# Altium PCB test_board.PcbDoc (part 1 of 2)
Units mm, origin at the board's own origin, x right, y up, seen from the top; angles counter-clockwise.
Board outline 152.4 x 101.6 mm, 18 copper layers (F.Cu, F.Mask, B.Cu, B.Mask, F.SilkS, B.SilkS, F.Adhes, B.Adhes, F.Paste, B.Paste, Dwgs.User, Cmts.User, Eco1.User, Eco2.User, Edge.Cuts, Margin, B.CrtYd, F.CrtYd); 95 components, 140 nets, 510 pads, 121 vias.
Unrouted connection lines stored in the file: 95.
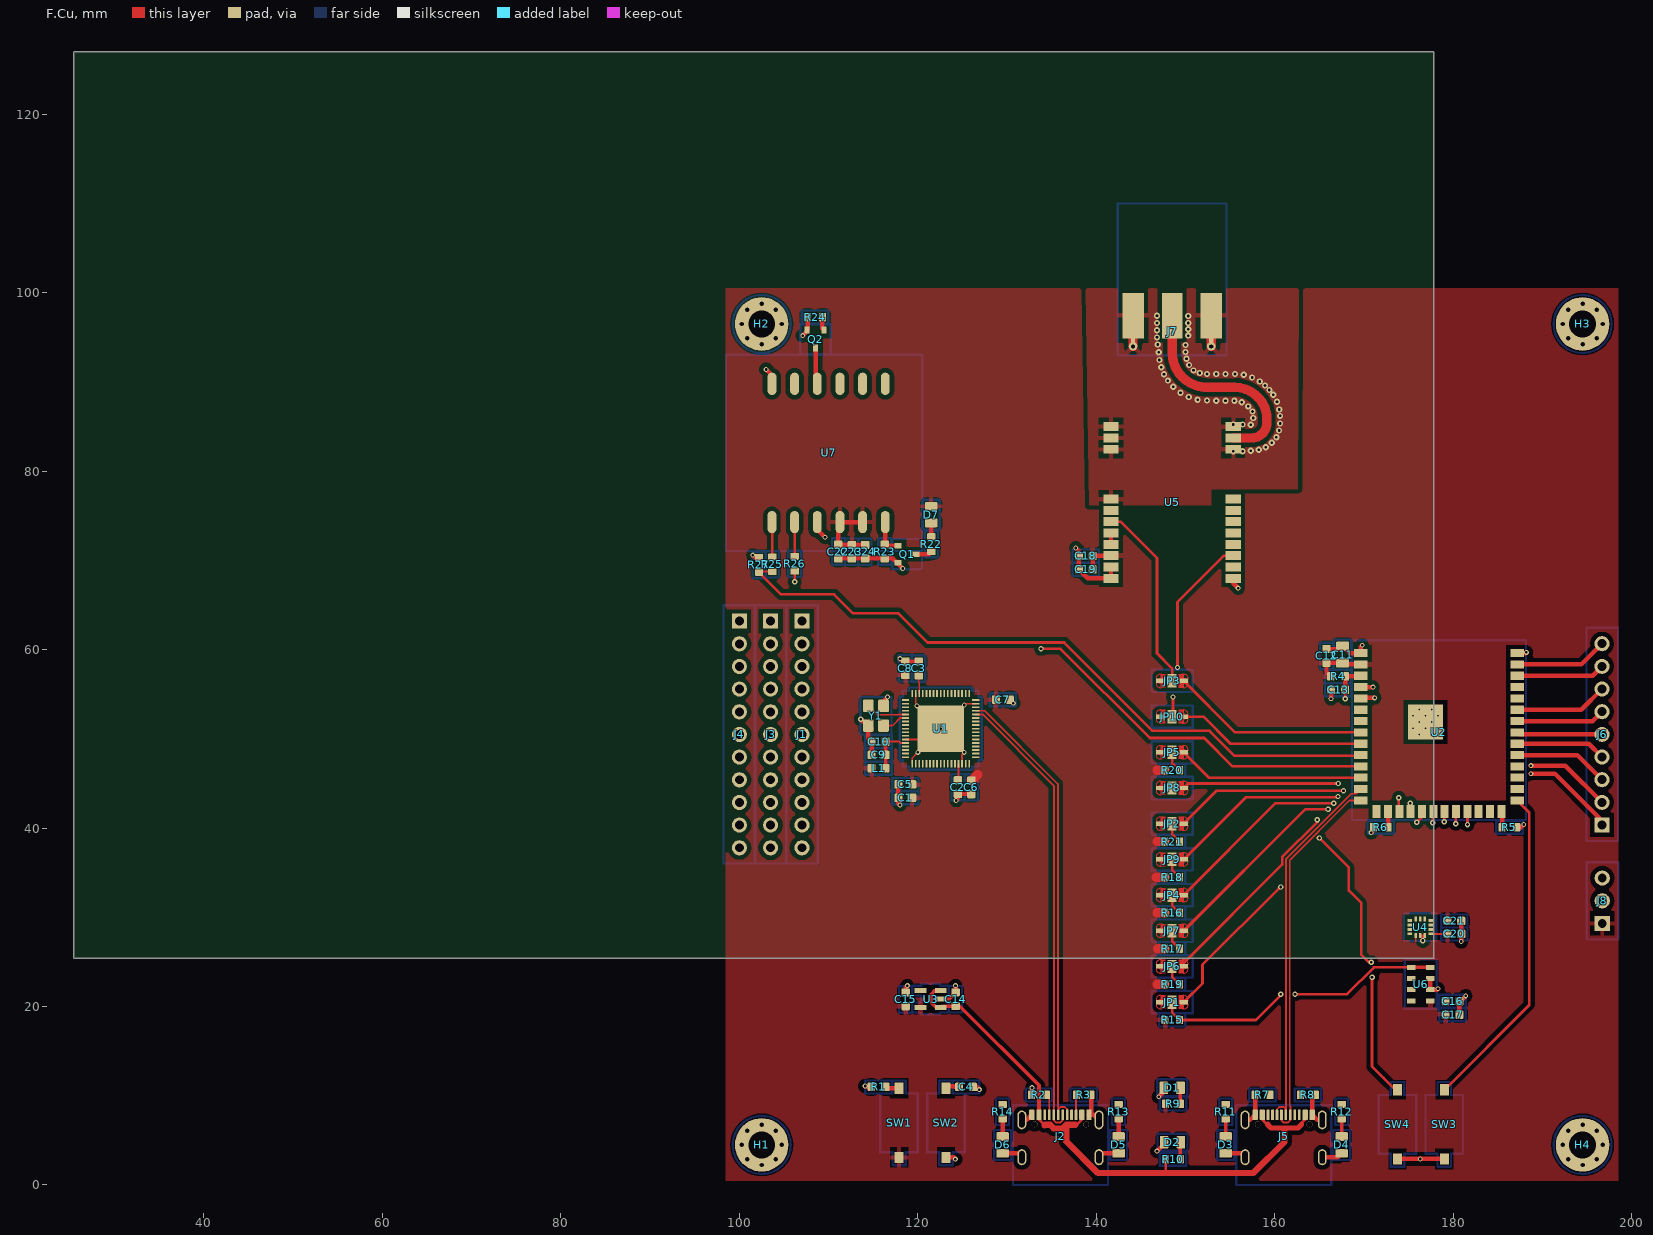
[diagram p0: F.Cu view]
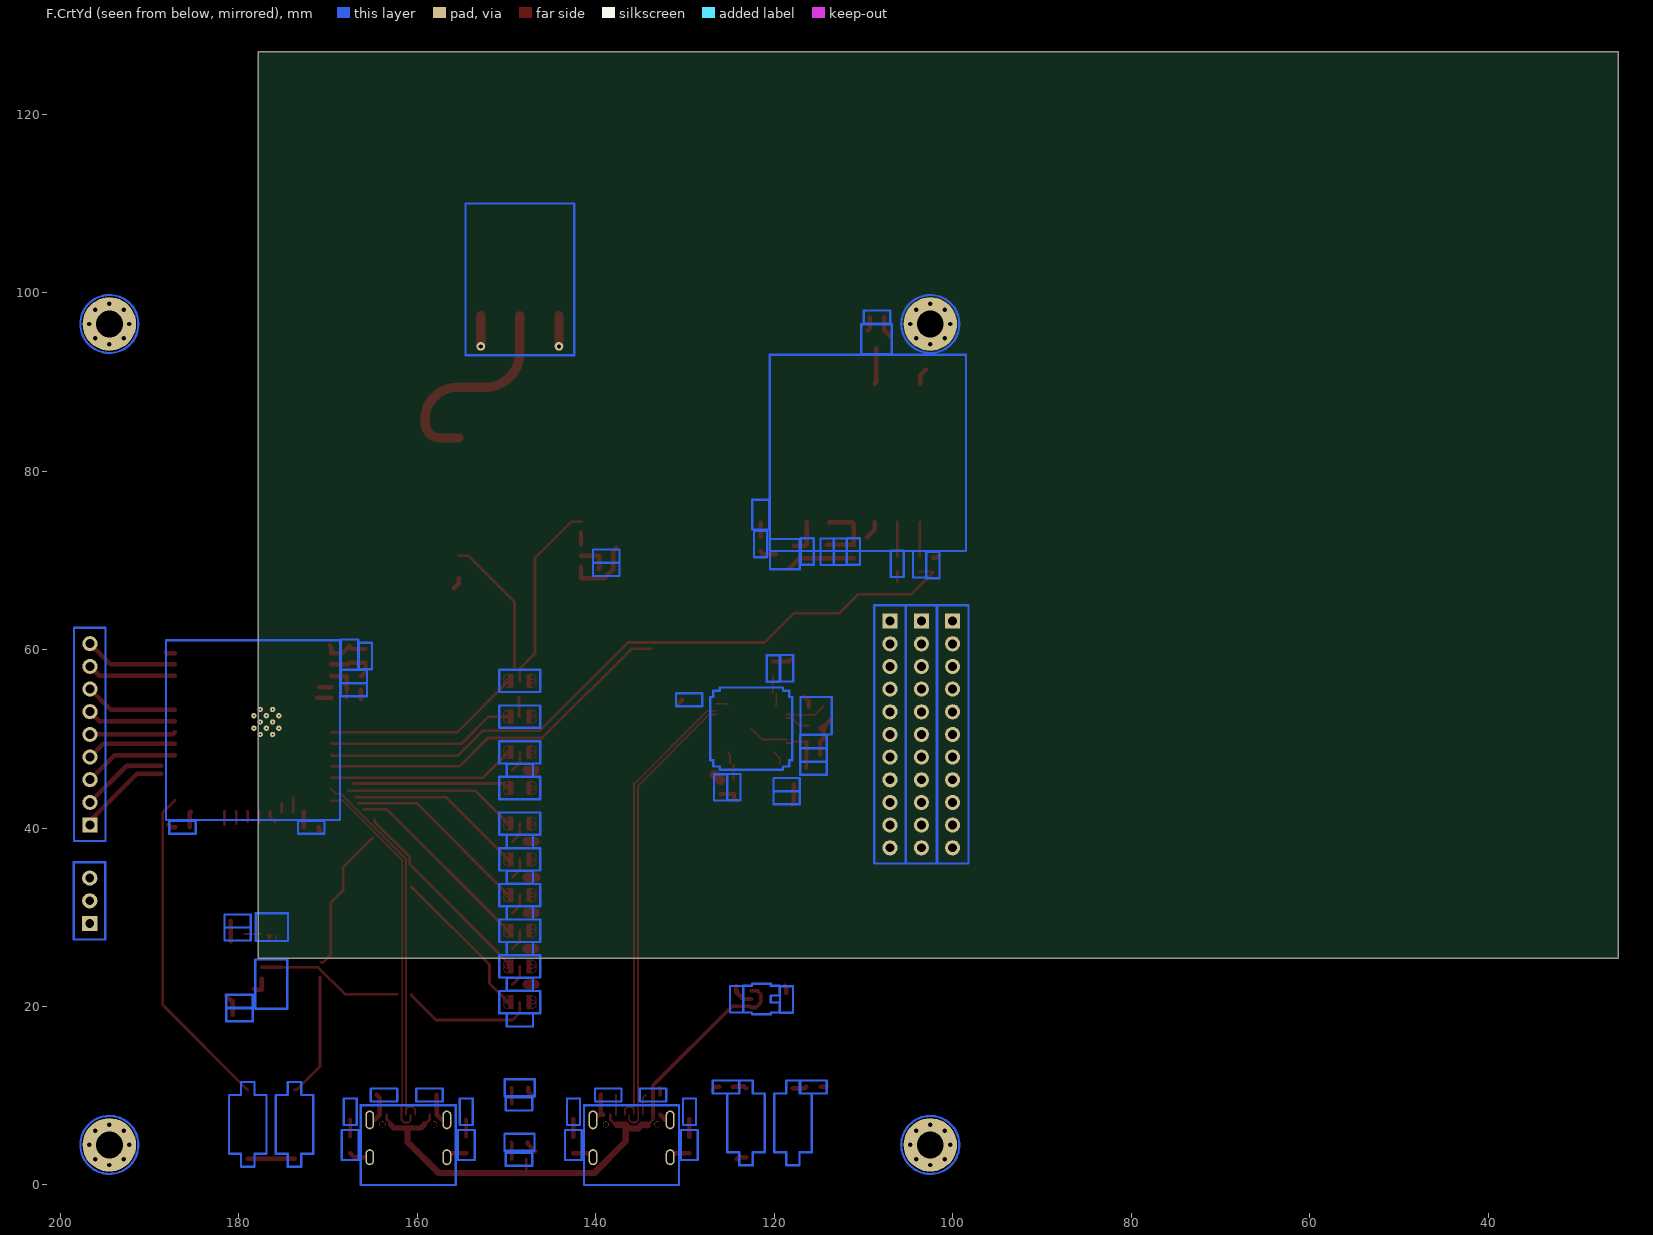
[diagram p1: F.CrtYd view, seen from below]
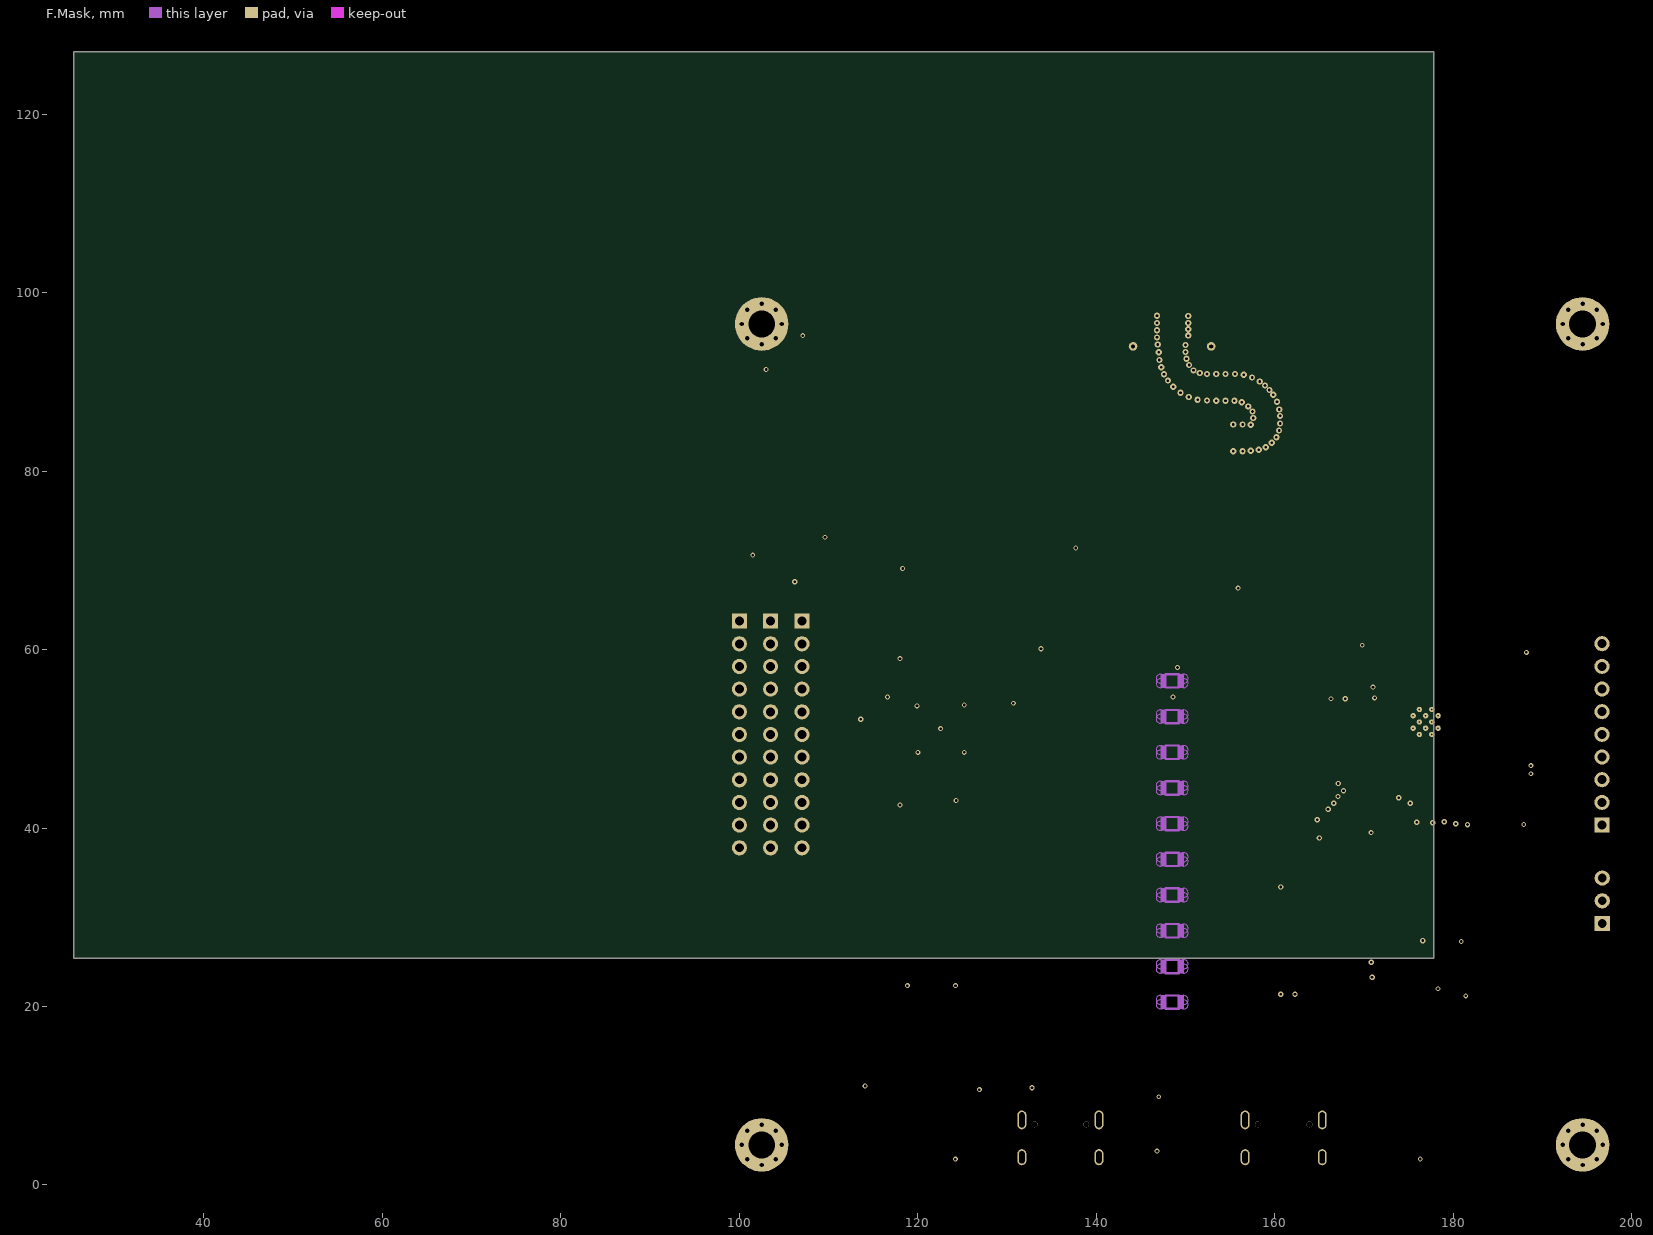
[diagram p2: F.Mask]
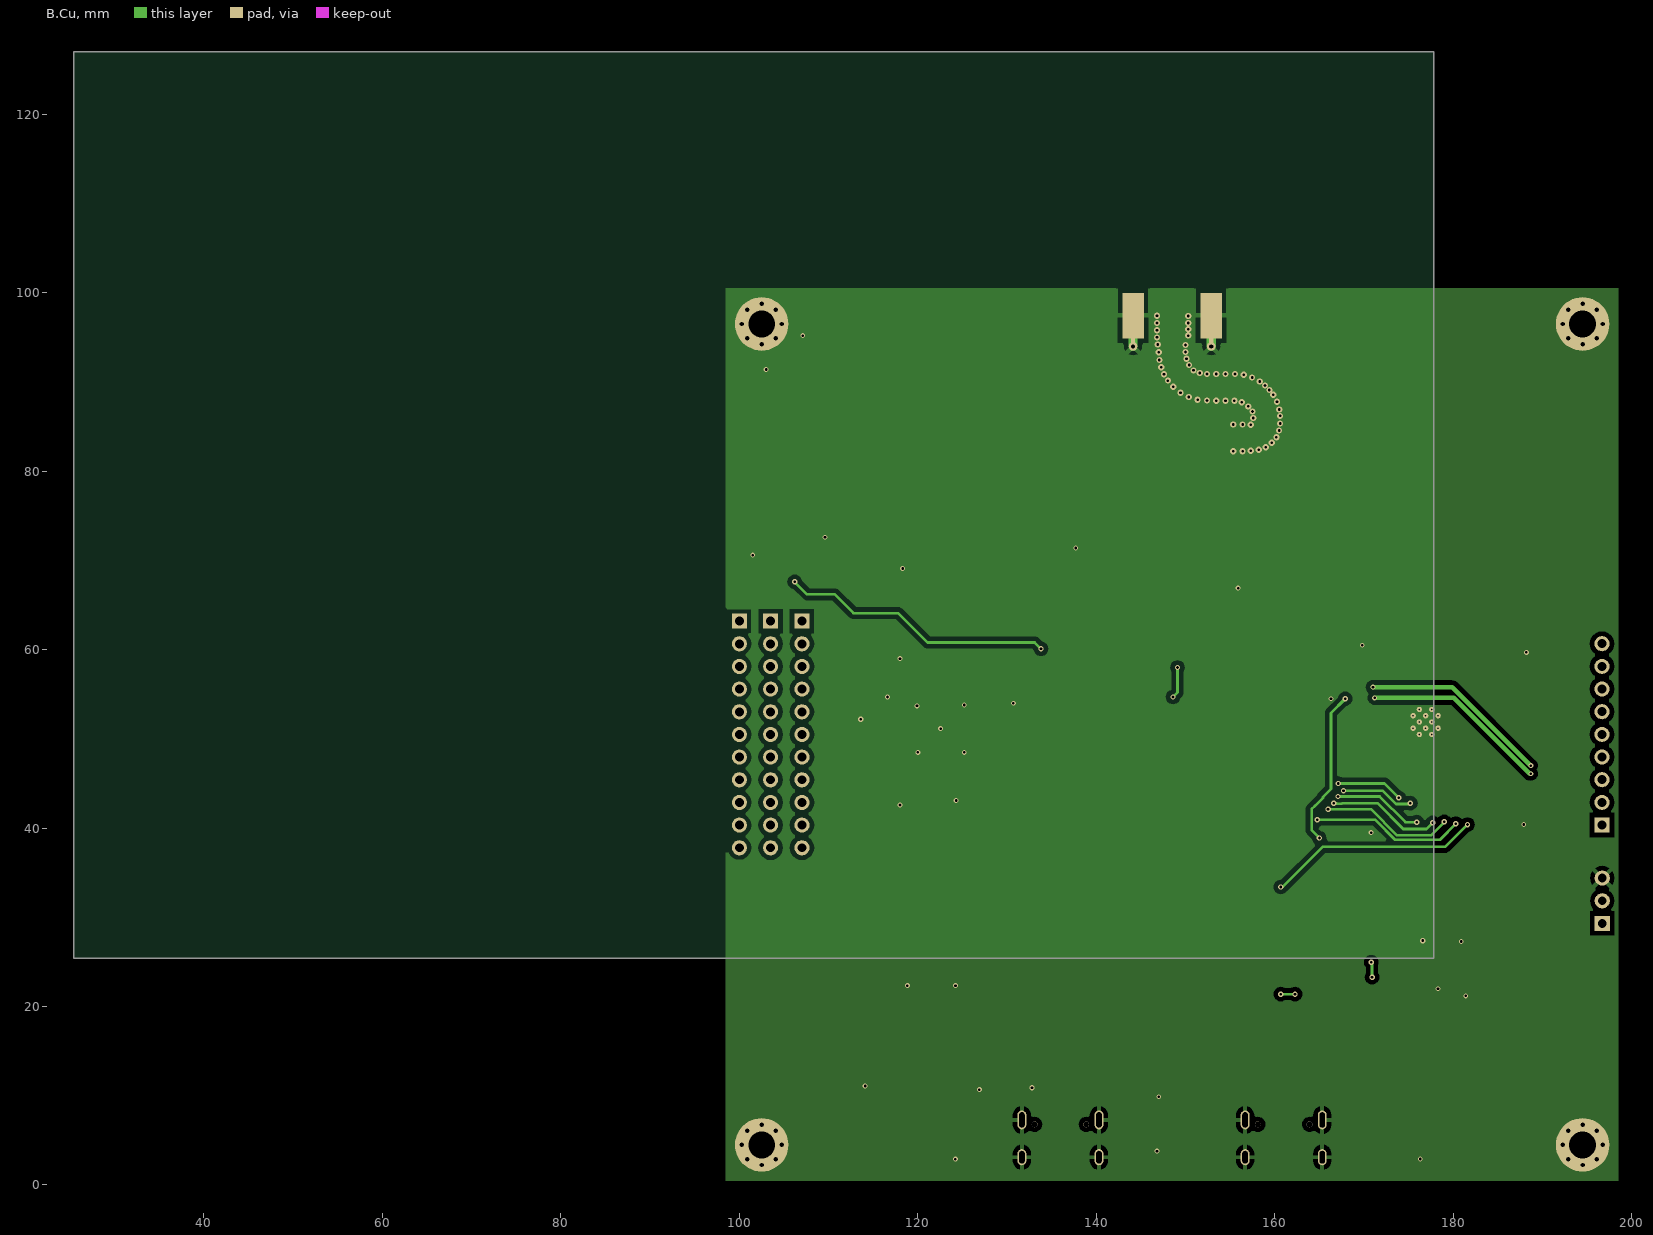
[diagram p3: B.Cu]
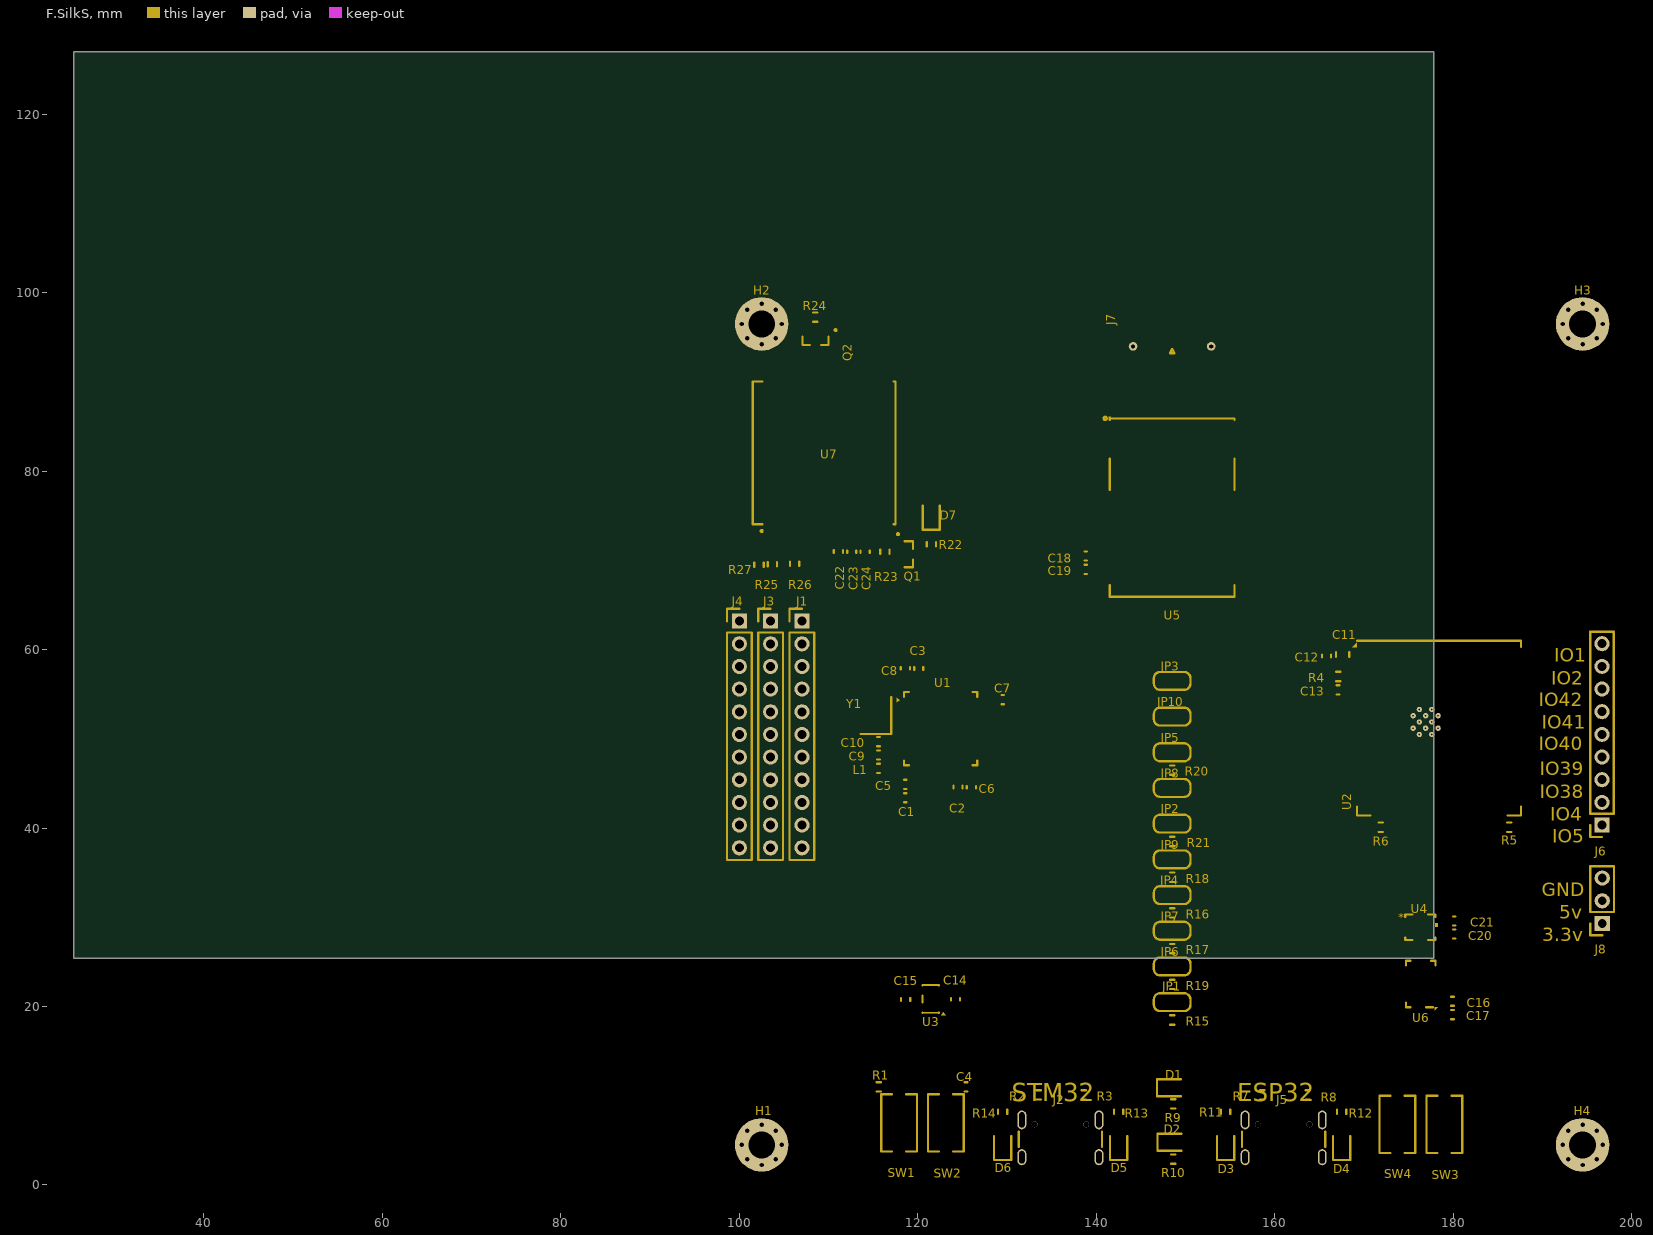
[diagram p4: F.SilkS]
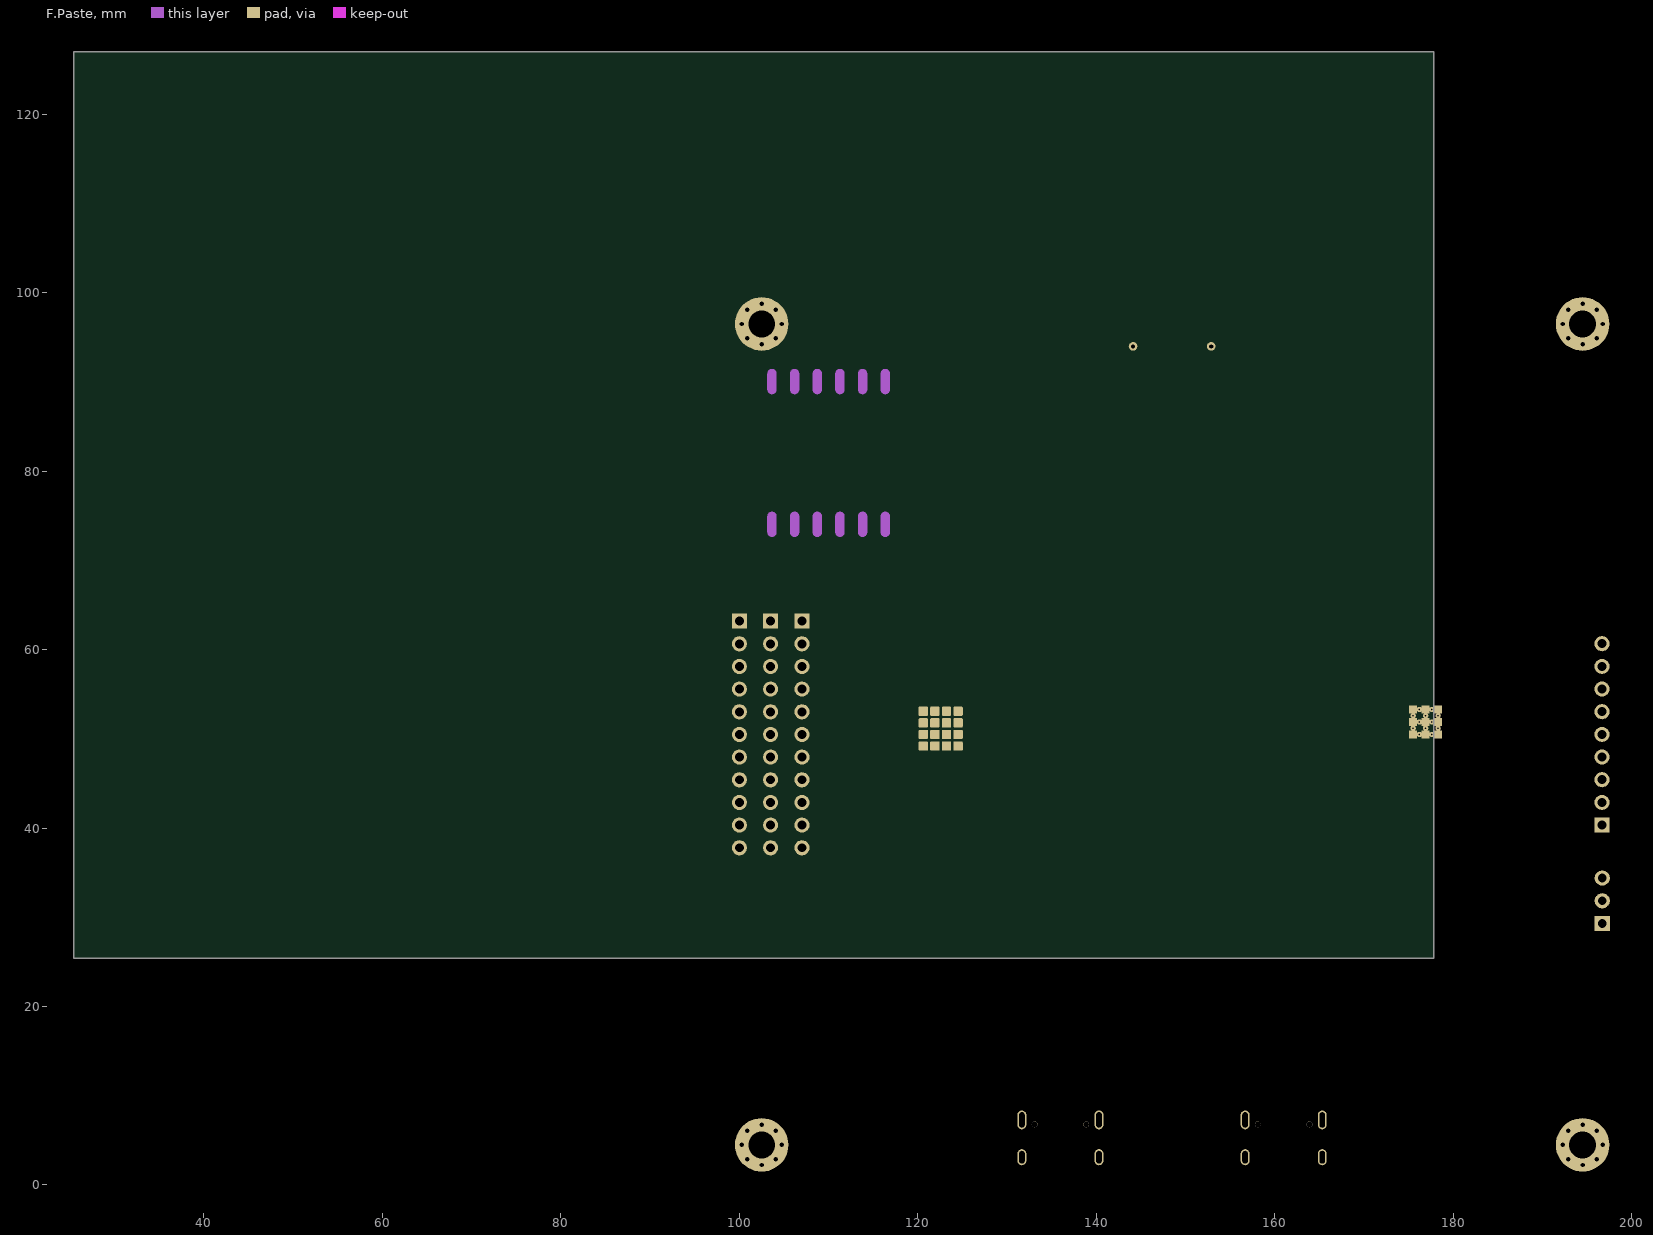
[diagram p5: F.Paste]
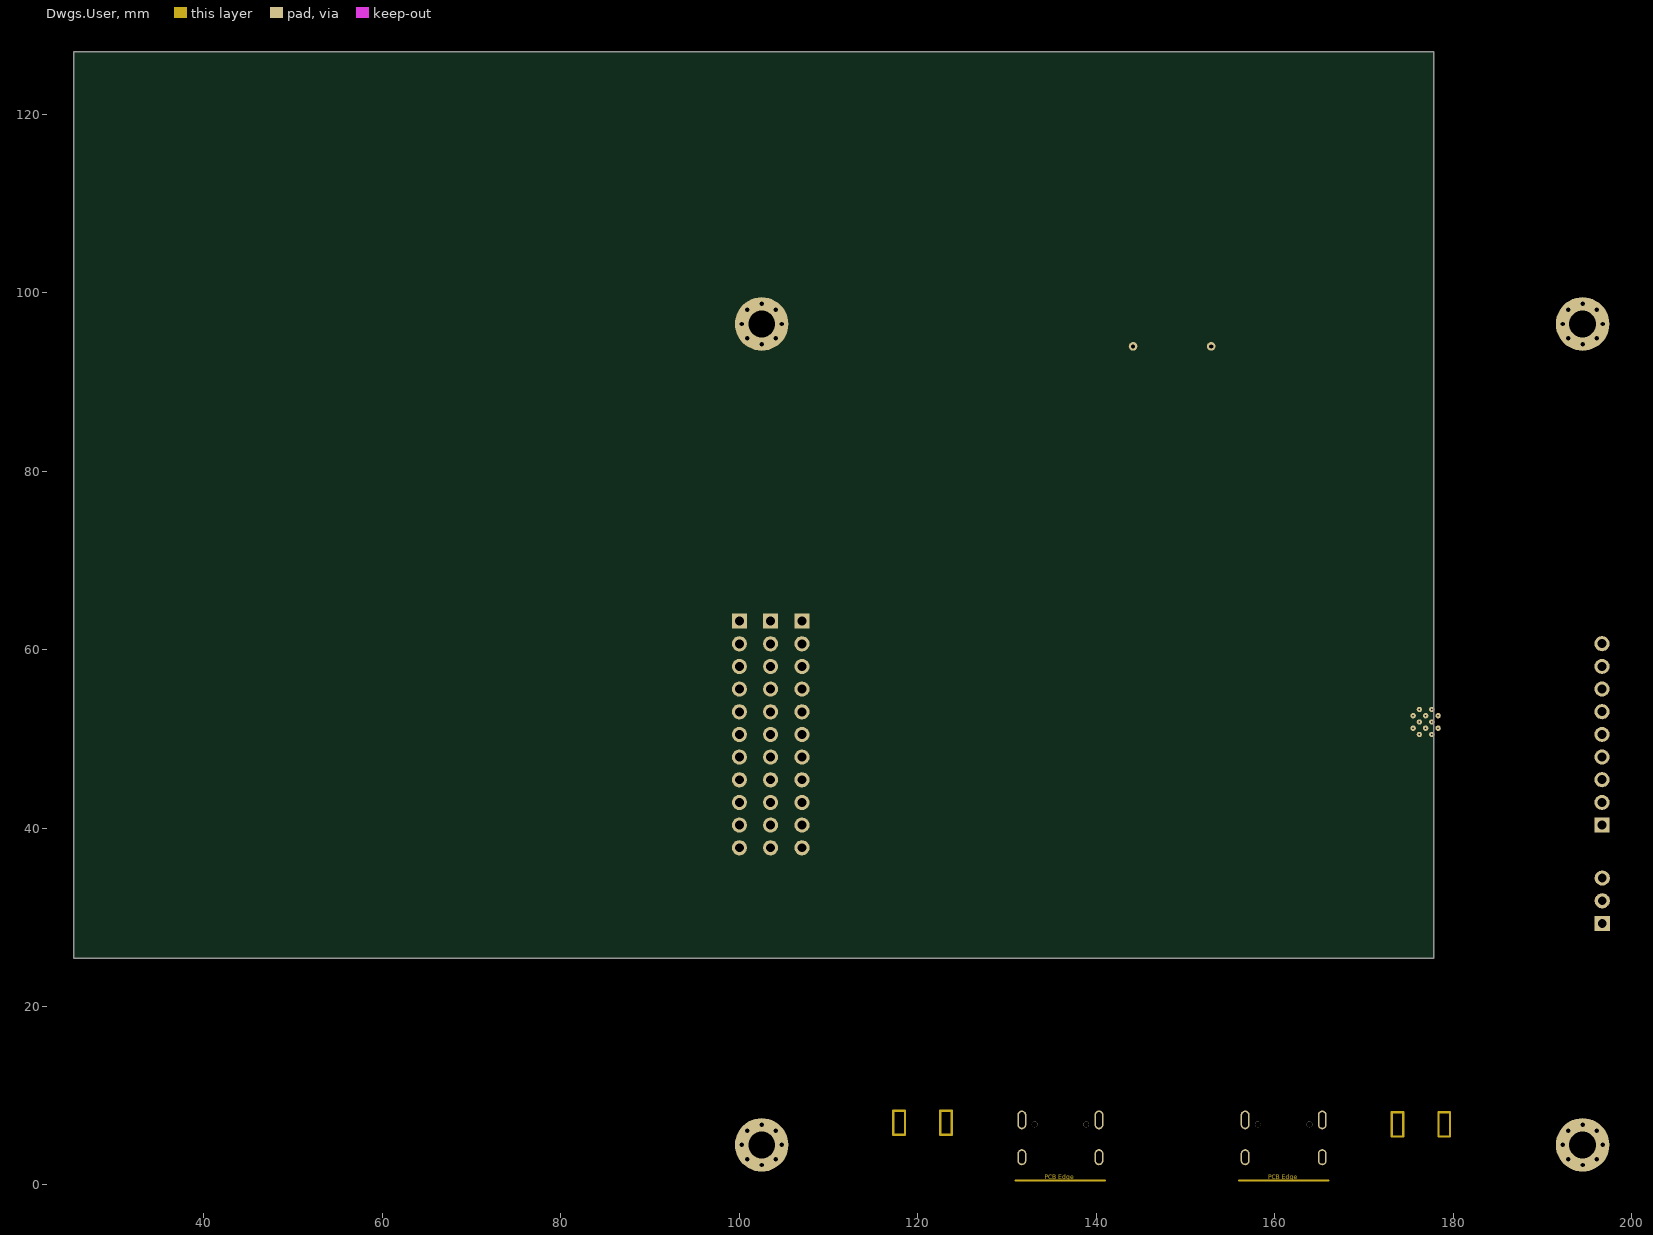
[diagram p6: Dwgs.User]
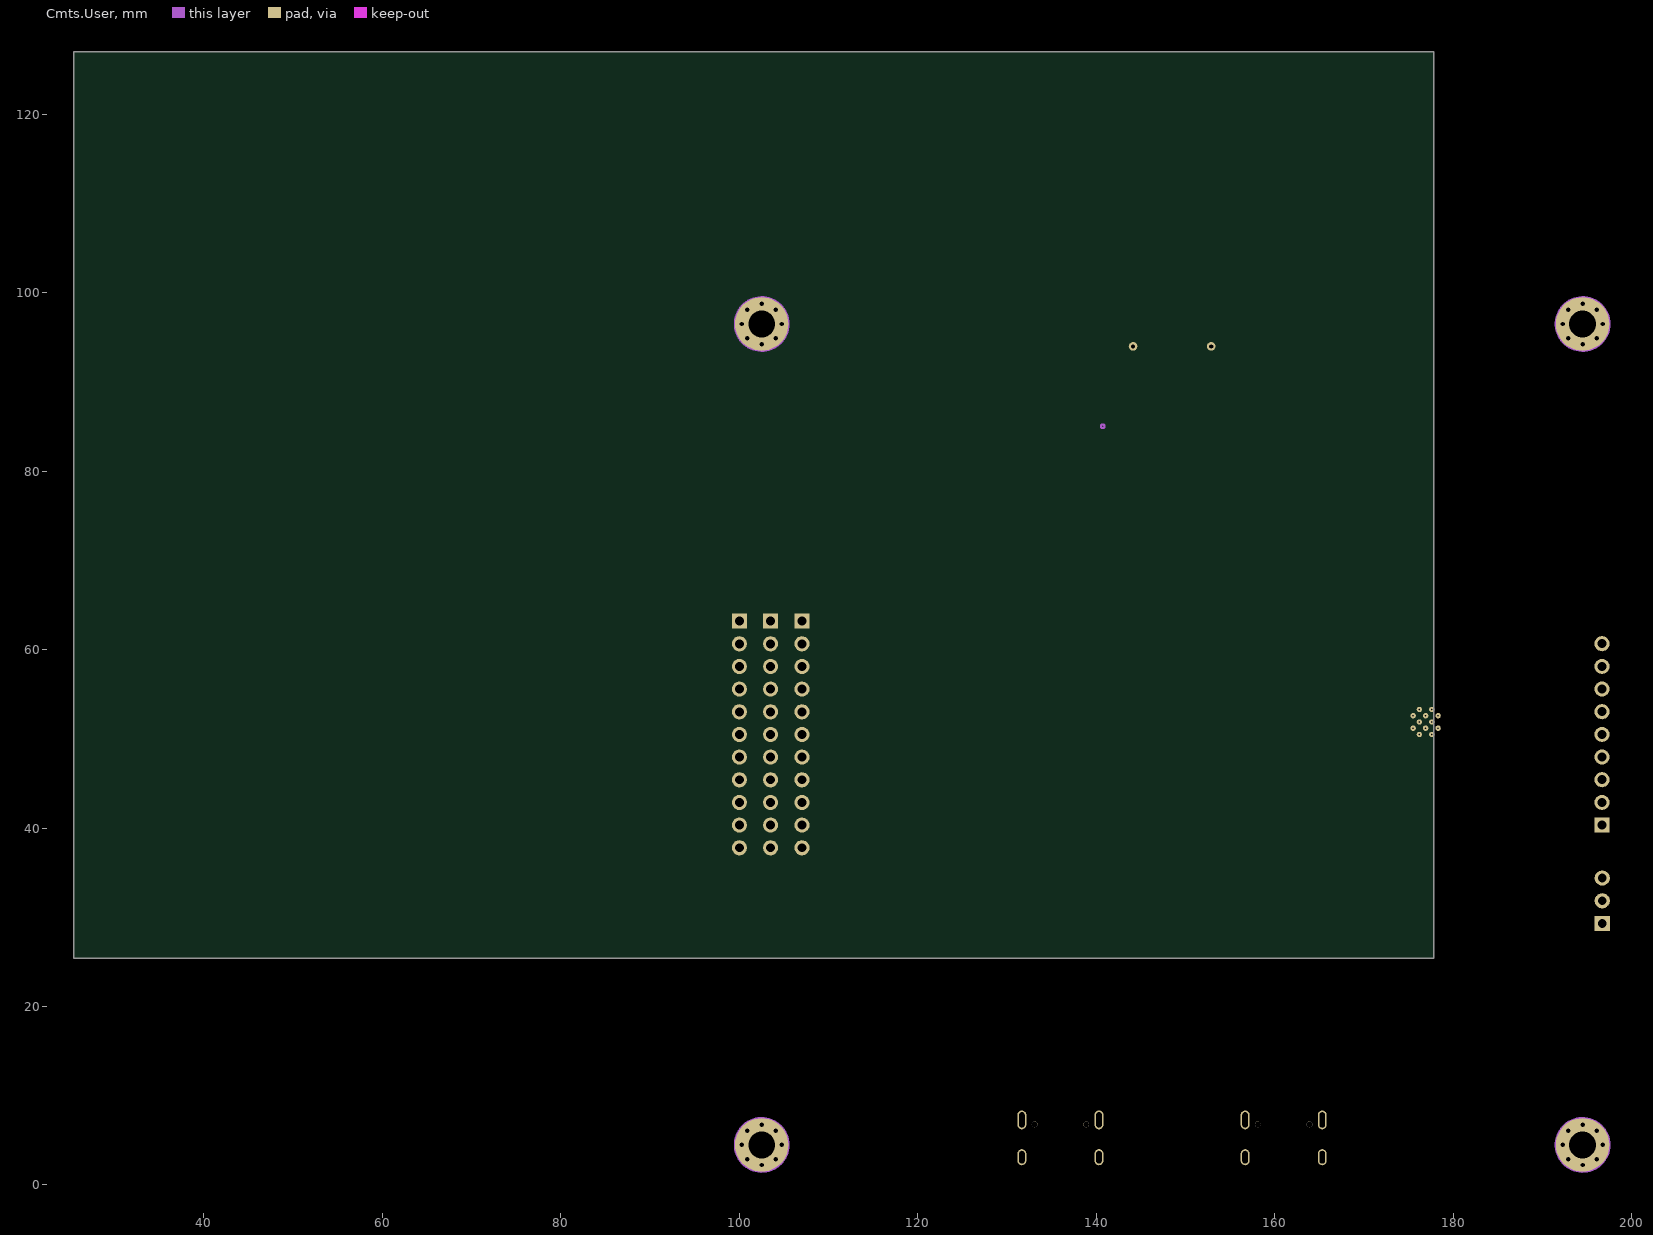
[diagram p7: Cmts.User]
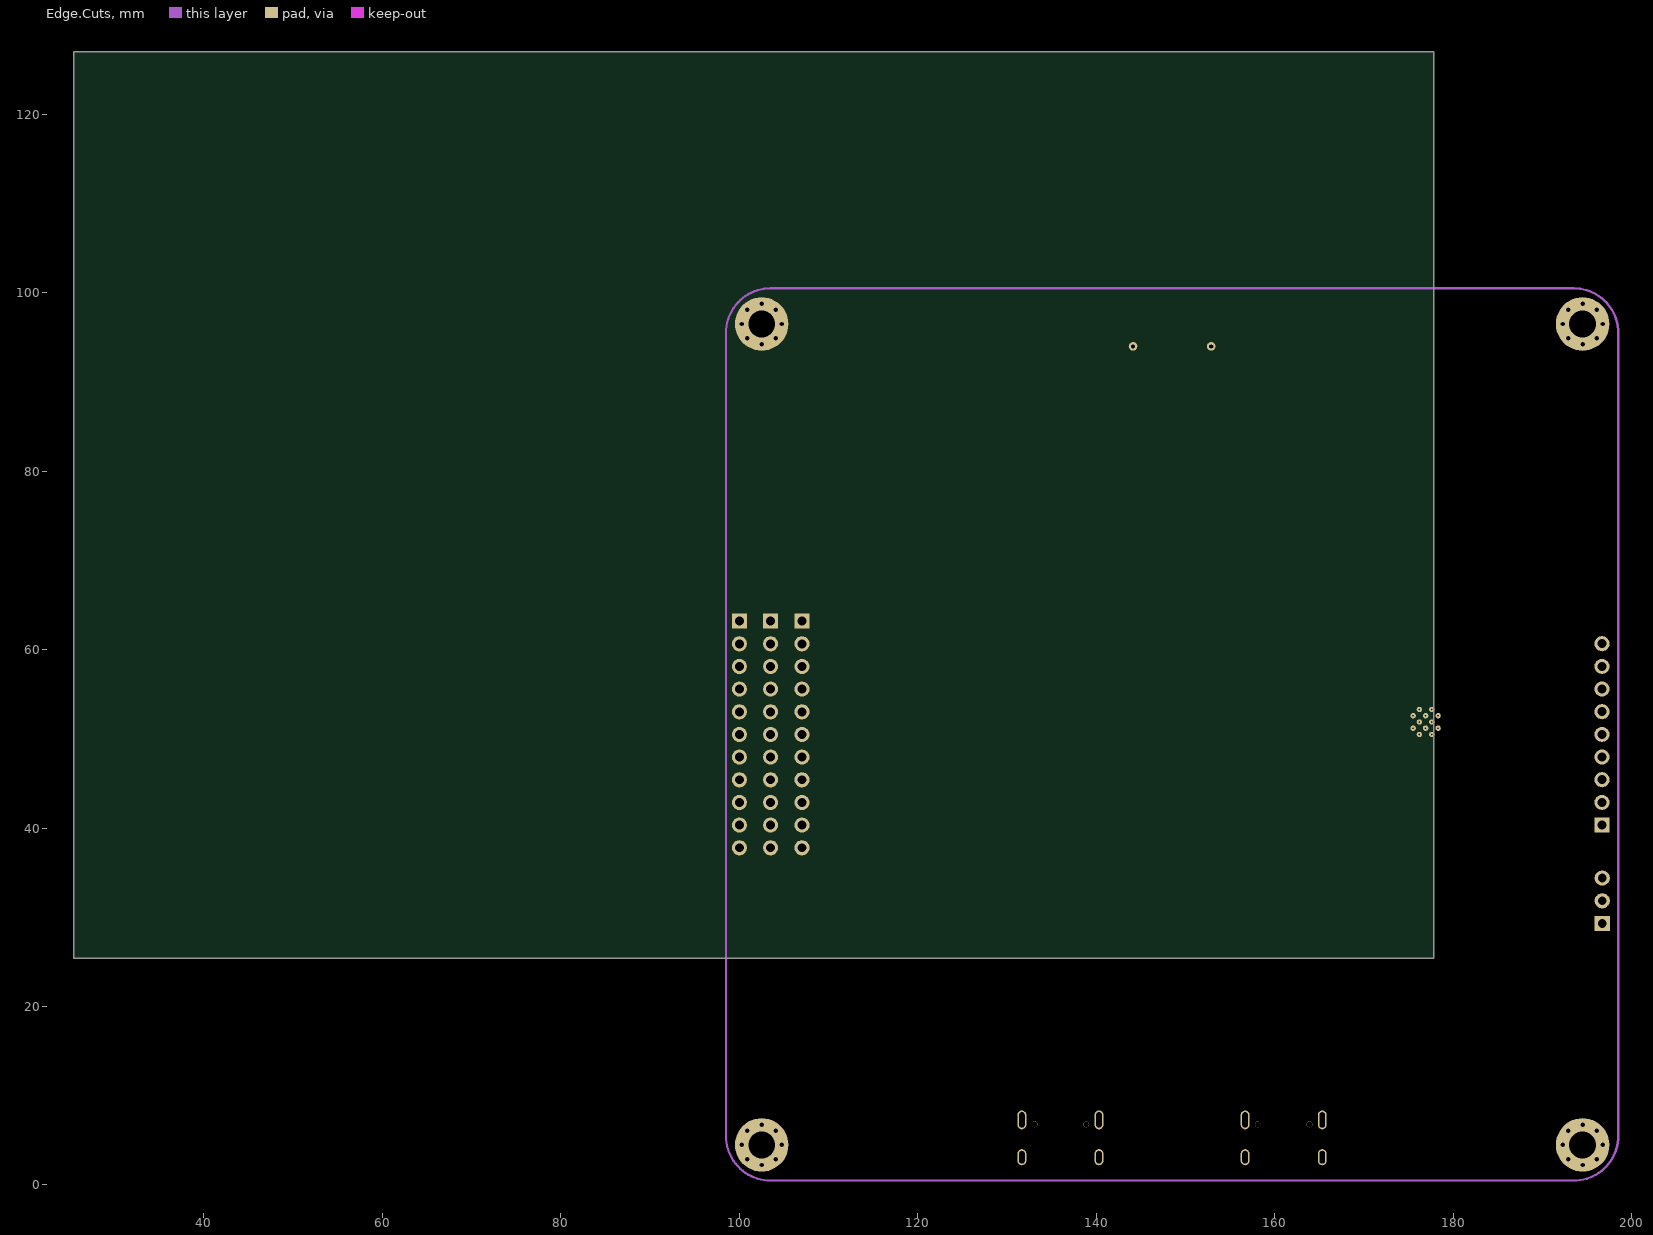
[diagram p8: Edge.Cuts]
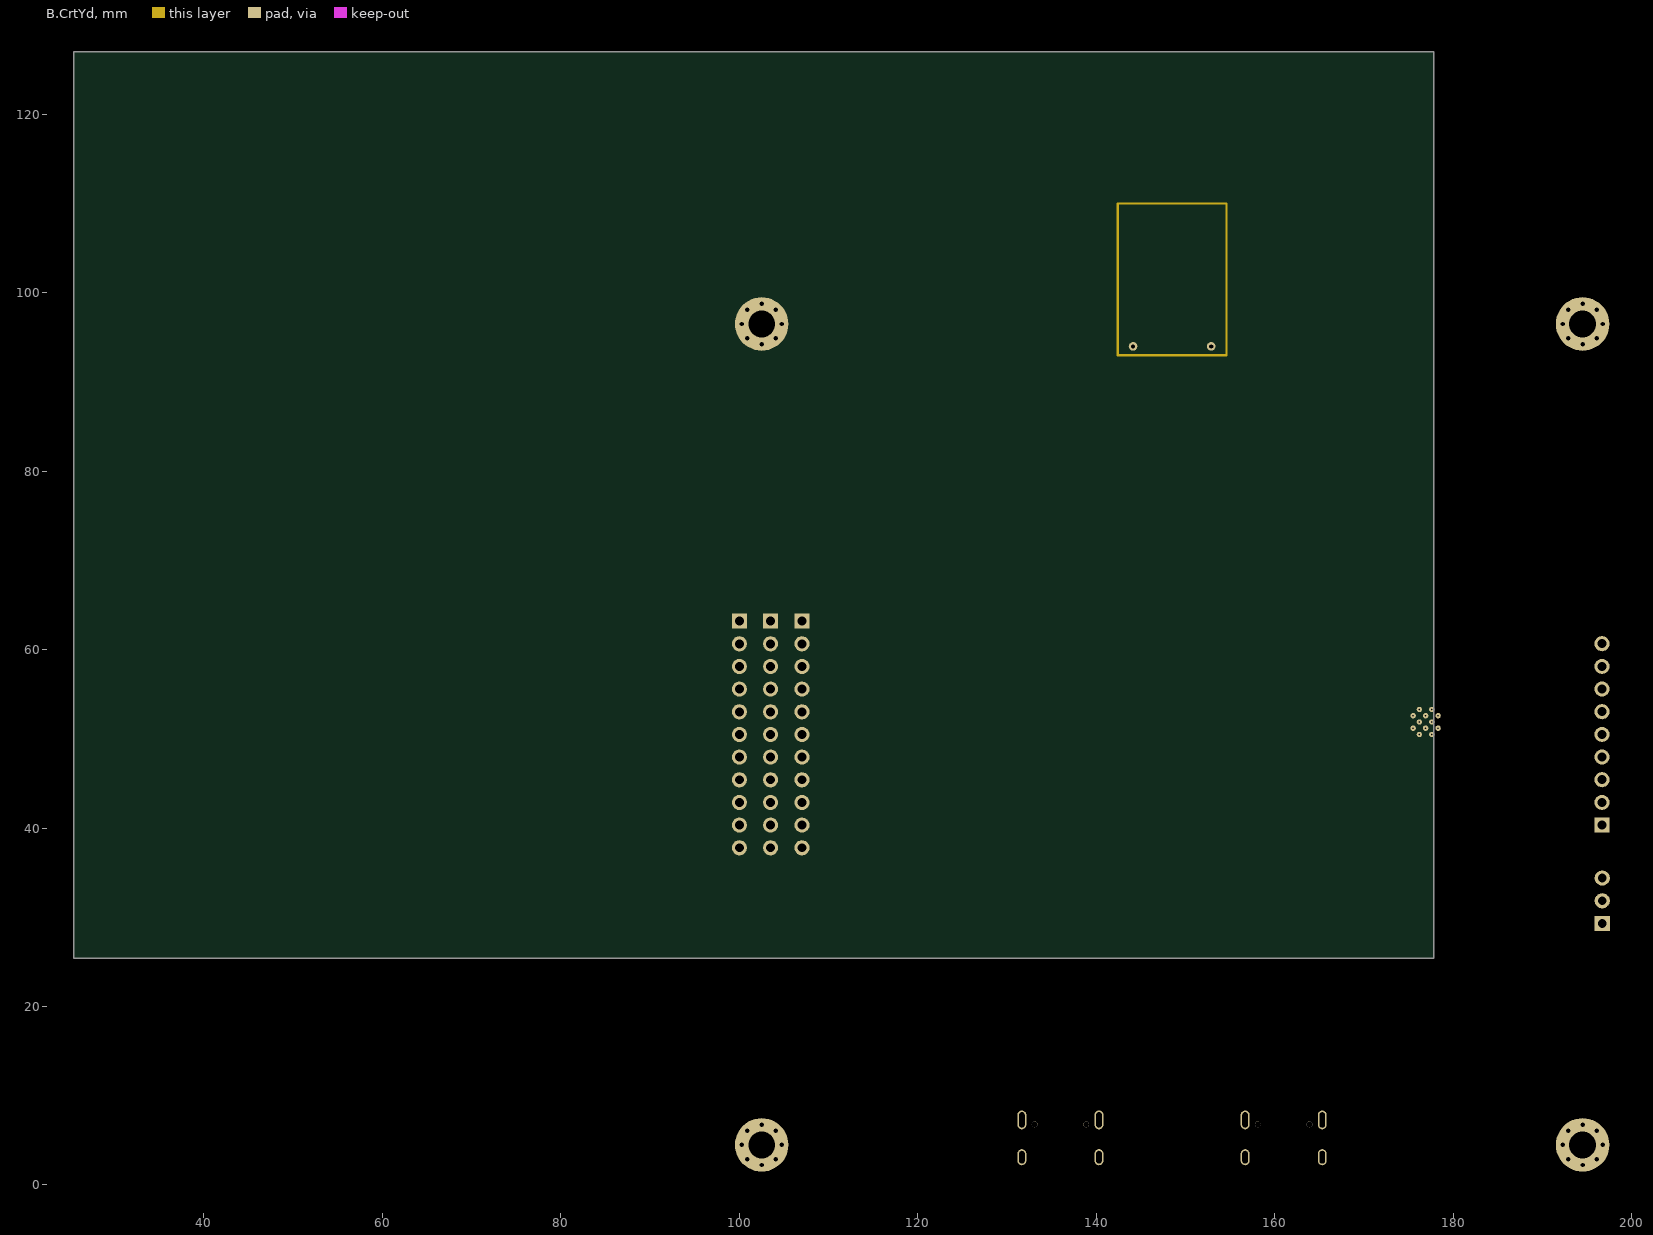
[diagram p9: B.CrtYd]

## Layer stack, top to bottom
Top Solder: solder mask 0.0102, Solder Resist, Dk 3.5
F.Cu: signal copper 0.0356
Dielectric 1: dielectric 0.32, FR-4, Dk 4.8
F.Mask: signal copper 0.0356
Dielectric2: dielectric 0.32, FR-4, Dk 4.8
B.Cu: signal copper 0.0356
Dielectric3: dielectric 0.32, FR-4, Dk 4.8
B.Mask: signal copper 0.0356
Dielectric4: dielectric 0.32, FR-4, Dk 4.8
F.SilkS: signal copper 0.0356
Dielectric5: dielectric 0.32, FR-4, Dk 4.8
B.SilkS: signal copper 0.0356
Dielectric6: dielectric 0.32, FR-4, Dk 4.8
F.Adhes: signal copper 0.0356
Dielectric7: dielectric 0.32, FR-4, Dk 4.8
B.Adhes: signal copper 0.0356
Dielectric8: dielectric 0.32, FR-4, Dk 4.8
F.Paste: signal copper 0.0356
Dielectric9: dielectric 0.32, FR-4, Dk 4.8
B.Paste: signal copper 0.0356
Dielectric10: dielectric 0.32, FR-4, Dk 4.8
Dwgs.User: signal copper 0.0356
Dielectric11: dielectric 0.32, FR-4, Dk 4.8
Cmts.User: signal copper 0.0356
Dielectric12: dielectric 0.32, FR-4, Dk 4.8
Eco1.User: signal copper 0.0356
Dielectric13: dielectric 0.32, FR-4, Dk 4.8
Eco2.User: signal copper 0.0356
Dielectric14: dielectric 0.32, FR-4, Dk 4.8
Edge.Cuts: signal copper 0.0356
Dielectric15: dielectric 0.32, FR-4, Dk 4.8
Margin: signal copper 0.0356
Dielectric16: dielectric 0.32, FR-4, Dk 4.8
B.CrtYd: signal copper 0.0356
Dielectric17: dielectric 0.32, FR-4, Dk 4.8
F.CrtYd: signal copper 0.0356
Bottom Solder: solder mask 0.0102, Solder Resist, Dk 3.5

## Board outline
25.4,25.4 177.8,25.4 177.8,127 25.4,127

## Design rules (kind name [scope] priority, off if disabled: settings)
Clearance "Clearence 0.5_Polygon" [InNamedPolygon('F.Cu-GND') OR InNamedPolygon('F.Cu-+3.3V') OR InNamedPolygon('B.Cu-GND')] p1: gap=0.5 ignorepadtopadclearanceinfootprint=FALSE
Clearance "Clearence 0.1951_NetClass" [InNetClass('Default')] p2: gap=0.195 ignorepadtopadclearanceinfootprint=FALSE
MinimumSolderMaskSliver [All] p1: minsoldermaskwidth=0
PolygonConnect Polygon_B.Cu-GND_ConnectDirect [IsNamedPolygon('B.Cu-GND') vs IsVia] p1: connectstyle=Direct reliefconductorwidth=0.254 reliefentries=4 polygonreliefangle="90 Angle" airgapwidth=0.254
PolygonConnect Polygon_B.Cu-GND_ConnectRelief45 [IsNamedPolygon('B.Cu-GND') vs (IsThruPin or IsSMTPin) and (PadShape_AllLayers = 'Round')] p2: connectstyle=Relief reliefconductorwidth=0.5 reliefentries=4 polygonreliefangle="45 Angle" airgapwidth=0.5
PolygonConnect Polygon_B.Cu-GND_ConnectRelief90 [IsNamedPolygon('B.Cu-GND') vs (IsThruPin or IsSMTPin) and (PadShape_AllLayers <> 'Round')] p3: connectstyle=Relief reliefconductorwidth=0.5 reliefentries=4 polygonreliefangle="90 Angle" airgapwidth=0.5
PolygonConnect Polygon_F.Cu-+3.3V_ConnectDirect [IsNamedPolygon('F.Cu-+3.3V') vs IsVia] p4: connectstyle=Direct reliefconductorwidth=0.254 reliefentries=4 polygonreliefangle="90 Angle" airgapwidth=0.254
PolygonConnect Polygon_F.Cu-+3.3V_ConnectRelief45 [IsNamedPolygon('F.Cu-+3.3V') vs (IsThruPin or IsSMTPin) and (PadShape_AllLayers = 'Round')] p5: connectstyle=Relief reliefconductorwidth=0.5 reliefentries=4 polygonreliefangle="45 Angle" airgapwidth=0.5
PolygonConnect Polygon_F.Cu-+3.3V_ConnectRelief90 [IsNamedPolygon('F.Cu-+3.3V') vs (IsThruPin or IsSMTPin) and (PadShape_AllLayers <> 'Round')] p6: connectstyle=Relief reliefconductorwidth=0.5 reliefentries=4 polygonreliefangle="90 Angle" airgapwidth=0.5
PolygonConnect Polygon_F.Cu-GND_ConnectDirect [IsNamedPolygon('F.Cu-GND') vs IsVia] p7: connectstyle=Direct reliefconductorwidth=0.254 reliefentries=4 polygonreliefangle="90 Angle" airgapwidth=0.254
PolygonConnect Polygon_F.Cu-GND_ConnectRelief45 [IsNamedPolygon('F.Cu-GND') vs (IsThruPin or IsSMTPin) and (PadShape_AllLayers = 'Round')] p8: connectstyle=Relief reliefconductorwidth=0.5 reliefentries=4 polygonreliefangle="45 Angle" airgapwidth=0.5
PolygonConnect Polygon_F.Cu-GND_ConnectRelief90 [IsNamedPolygon('F.Cu-GND') vs (IsThruPin or IsSMTPin) and (PadShape_AllLayers <> 'Round')] p9: connectstyle=Relief reliefconductorwidth=0.5 reliefentries=4 polygonreliefangle="90 Angle" airgapwidth=0.5
RoutingVias [All] p1: holewidth=0.711 width=1.27 viastyle="Through Hole" minholewidth=0.711 minwidth=1.27 maxholewidth=0.711 maxwidth=1.27
SilkToSilkClearance [All] p1: silktosilkclearance=0
SilkToSolderMaskClearance [IsPad] p1: minsilkscreentomaskgap=0 clearancetoexposedcopper=TRUE
SolderMaskExpansion [All] p1: expansion=0 istentingtop=FALSE
Width [All] p1: maxlimit=10 minlimit=0.254 preferedwidth=0.2 midlayer3_maxwidth=0.254 midlayer3_prefwidth=0.254 midlayer7_maxwidth=0.254 midlayer7_prefwidth=0.254 midlayer9_maxwidth=0.254 midlayer9_prefwidth=0.254 midlayer11_maxwidth=0.254 midlayer11_prefwidth=0.254 midlayer15_maxwidth=0.254 midlayer15_prefwidth=0.254 midlayer21_maxwidth=0.254 midlayer21_prefwidth=0.254 midlayer23_maxwidth=0.254 midlayer23_prefwidth=0.254 midlayer27_maxwidth=0.254 midlayer27_prefwidth=0.254 minimp=50.000000 maximp=50.000000 favimp=50.000000
27 further rules are at their usual default settings.

## Classes and differential pairs
net class Default: 1PPS 22S_BUSY 22S_CS 22S_DIO1 22S_RST 22S_RXEN +3.3V +3.3VA BOOTesp CS_LSM1 CS_MS5611 esp22S_BUSY esp22S_CS esp22S_DIO1 esp22S_RST esp22S_RXEN espCS_LSM1 espCS_MS5611 espLED_1 espLED_2 espSPI_CLK espSPI_MISO espSPI_MOSI FORCE_ON GND GPS_RST IO1 IO2 IO4 IO5 IO38 IO39 IO40 IO41 IO42 l86_rst Net-(C2-Pad1) Net-(C3-Pad1) Net-(D1-A) Net-(D2-A) Net-(D3-A) Net-(D4-A) Net-(D5-A) Net-(D6-A) Net-(D7-K) Net-(J2-CC1) Net-(J2-CC2) Net-(J5-CC1) Net-(J5-CC2) Net-(J7-In) Net-(Q1-Pad3) Net-(SW1-B) Net-(SW2-B) Net-(U1-PH0) Net-(U1-PH1) Net-(U2-IO45) Net-(U2-IO46) Net-(U5-DIO2) Net-(U7-RXD1) Net-(U7-TXD1) PA0 PA1 PA2 PA3 PA4 PA7 PA8 PA10 PA13 PA14 PA15 PB0 PB1 PB2 PB3 PB4 PB5 PB6 PB7 PB8 PB9 PB12 PB13 PB14 PB15 PC4 PC5 PC6 PC7 PC8 PC9 PD11 PD12 RSTesp RX_GPS SPI_CLK SPI_MISO SPI_MOSI stm22S_BUSY stm22S_CS stm22S_DIO1 stm22S_RST stm22S_RXEN stmCS_LSM1 stmCS_MS5611 stmI2C_SCL stmI2C_SDA stmLED_1 stmLED_2 stmSPI_CLK stmSPI_MISO stmSPI_MOSI TX_GPS unconnected-(J2-SBU1-PadA8) unconnected-(J2-SBU2-PadB8) unconnected-(J5-SBU1-PadA8) unconnected-(J5-SBU2-PadB8) unconnected-(U1-PC14-Pad3) unconnected-(U1-PE0-Pad65) unconnected-(U2-IO3-Pad15) unconnected-(U2-IO35-Pad28) unconnected-(U2-IO36-Pad29) unconnected-(U2-IO37-Pad30) unconnected-(U2-RXD0-Pad36) unconnected-(U2-TXD0-Pad37) unconnected-(U3-NC-Pad4) unconnected-(U4-INT1-Pad4) unconnected-(U4-INT2-Pad9) unconnected-(U4-NC-Pad10) unconnected-(U4-NC-Pad11) unconnected-(U4-SCx-Pad3) unconnected-(U4-SDx-Pad2) unconnected-(U5-DIO3-Pad5) unconnected-(U7-AADET_N-Pad8) unconnected-(U7-EX_ANT-Pad11) USBesp_DN USBesp_DP USBstm_DN USBstm_DP VBUS

## Components (designator, comment, footprint, x,y, rotation, side; value= is the part's Value field where it differs from the comment)
C1 "Comment" C_0603_1608Metric 118.6,43.385 r180 top value=4.7uF
C2 "Comment" C_0603_1608Metric 124.5,44.585 r270 top value=2.2uF
C3 "Comment" C_0603_1608Metric 120.1,57.885 r90 top value=2.2uF
C4 "Comment" C_0603_1608Metric 125.4,10.985 r180 top value=100nF
C5 "Comment" C_0603_1608Metric 118.6,44.885 r180 top value=100nF
C6 "Comment" C_0603_1608Metric 126,44.56 r270 top value=100nF
C7 "Comment" C_0603_1608Metric 129.525,54.385 r0 top value=100nF
C8 "Comment" C_0603_1608Metric 118.6,57.91 r90 top value=100nF
C9 "Comment" C_0603_1608Metric 115.6,48.185 r180 top value=1uF
C10 "Comment" C_0603_1608Metric 115.6,49.685 r180 top value=100nF
C11 "Comment" C_0805_2012Metric 167.6,59.435 r270 top value=22uF
C12 "Comment" C_0603_1608Metric 165.8,59.285 r270 top value=100nF
C13 "Comment" C_0603_1608Metric 167.1,55.485 r0 top value=100nF
C14 "Comment" C_0603_1608Metric 124.226,20.811 r270 top value=10uF
C15 "Comment" C_0603_1608Metric 118.626,20.786 r270 top value=10uF
C16 "Comment" C_0603_1608Metric 179.925,20.585 r0 top value=100nF
C17 "Comment" C_0603_1608Metric 179.925,19.085 r180 top value=100nF
C18 "Comment" C_0603_1608Metric 138.825,70.485 r180 top value=100nF
C19 "Comment" C_0603_1608Metric 138.825,68.985 r0 top value=10uF
C20 "Comment" C_0603_1608Metric 180.125,28.125 r0 top value=100nF
C21 "Comment" C_0603_1608Metric 180.125,29.585 r180 top value=100nF
C22 "Comment" C_0603_1608Metric 111.1,70.985 r270 top value=10uF
C23 "Comment" C_0603_1608Metric 112.6,70.96 r270 top value=100nF
C24 "Comment" C_0603_1608Metric 114.09,70.96 r270 top value=33pF
D1 "Comment" LED_0805_2012Metric 148.5,10.885 r0 top value=LED
D2 "Comment" LED_0805_2012Metric 148.538,4.785 r0 top value=LED
D3 "Comment" LED_0805_2012Metric 154.5,4.485 r90 top value=LED
D4 "Comment" LED_0805_2012Metric 167.5,4.485 r90 top value=LED
D5 "Comment" LED_0805_2012Metric 142.5,4.485 r90 top value=LED
D6 "Comment" LED_0805_2012Metric 129.5,4.485 r90 top value=LED
D7 "Comment" LED_0805_2012Metric 121.5,75.122 r90 top value=LED
H1 "Comment" MountingHole_3mm_Pad_Via 102.5,4.485 r0 top value=MountingHole_Pad
H2 "Comment" MountingHole_3mm_Pad_Via 102.5,96.485 r0 top value=MountingHole_Pad
H3 "Comment" MountingHole_3mm_Pad_Via 194.5,96.485 r0 top value=MountingHole_Pad
H4 "Comment" MountingHole_3mm_Pad_Via 194.5,4.485 r0 top value=MountingHole_Pad
J1 "Comment" PinHeader_1x11_P2.54mm_Vertical 107.01,63.185 r0 top value=Conn_01x11_Pin
J2 "Comment" USB_C_Receptacle_GCT_USB4105-xx-A_16P_TopMnt_Horizontal 135.98,4.18 r0 top value=USB_C_Receptacle_USB2.0_16P
J3 "Comment" PinHeader_1x11_P2.54mm_Vertical 103.5,63.185 r0 top value=Conn_01x11_Pin
J4 "Comment" PinHeader_1x11_P2.54mm_Vertical 100,63.185 r0 top value=Conn_01x11_Pin
J5 "Comment" USB_C_Receptacle_GCT_USB4105-xx-A_16P_TopMnt_Horizontal 161,4.18 r0 top value=USB_C_Receptacle_USB2.0_16P
J6 "Comment" PinSocket_1x09_P2.54mm_Vertical 196.675,40.335 r180 top value=Conn_01x09_Pin
J7 "Comment" SMA_Molex_73251-1153_EdgeMount_Horizontal 148.5,95.695 r270 top value=Conn_Coaxial
J8 "Comment" PinSocket_1x03_P2.54mm_Vertical 196.7,29.305 r180 top value=Conn_01x03_Pin
JP1 "Comment" SolderJumper-3_P1.3mm_Open_RoundedPad1.0x1.5mm_NumberLabels 148.5,20.485 r0 top value=SolderJumper_3_Open
JP2 "Comment" SolderJumper-3_P1.3mm_Open_RoundedPad1.0x1.5mm_NumberLabels 148.5,40.485 r0 top value=SolderJumper_3_Open
JP3 "Comment" SolderJumper-3_P1.3mm_Open_RoundedPad1.0x1.5mm_NumberLabels 148.5,56.485 r0 top value=SolderJumper_3_Open
JP4 "Comment" SolderJumper-3_P1.3mm_Open_RoundedPad1.0x1.5mm_NumberLabels 148.5,32.485 r0 top value=SolderJumper_3_Open
JP5 "Comment" SolderJumper-3_P1.3mm_Open_RoundedPad1.0x1.5mm_NumberLabels 148.5,48.485 r0 top value=SolderJumper_3_Open
JP6 "Comment" SolderJumper-3_P1.3mm_Open_RoundedPad1.0x1.5mm_NumberLabels 148.5,24.485 r0 top value=SolderJumper_3_Open
JP7 "Comment" SolderJumper-3_P1.3mm_Open_RoundedPad1.0x1.5mm_NumberLabels 148.5,28.485 r0 top value=SolderJumper_3_Open
JP8 "Comment" SolderJumper-3_P1.3mm_Open_RoundedPad1.0x1.5mm_NumberLabels 148.5,44.485 r0 top value=SolderJumper_3_Open
JP9 "Comment" SolderJumper-3_P1.3mm_Open_RoundedPad1.0x1.5mm_NumberLabels 148.5,36.485 r0 top value=SolderJumper_3_Open
JP10 "Comment" SolderJumper-3_P1.3mm_Open_RoundedPad1.0x1.5mm_NumberLabels 148.5,52.485 r0 top value=SolderJumper_3_Open
L1 "Comment" L_0603_1608Metric 115.6,46.685 r0 top value=27nH
Q1 "Comment" TRANS_SS8050-G 118.8,70.685 r0 top value=SS8050-G
Q2 "Comment" TRANS_SS8050-G 108.537,94.785 r270 top value=SS8050-G
R1 "Comment" R_0603_1608Metric 115.6,10.985 r0 top value=10kΩ
R2 "Comment" R_0603_1608Metric 133.575,10.085 r180 top value=5.1kΩ
R3 "Comment" R_0603_1608Metric 138.6,10.085 r180 top value=5.1kΩ
R4 "Comment" R_0603_1608Metric 167.1,56.985 r180 top value=10kΩ
R5 "Comment" R_0603_1608Metric 186.3,40.085 r0 top value=10kΩ
R6 "Comment" R_0603_1608Metric 171.875,40.085 r180 top value=10kΩ
R7 "Comment" R_0603_1608Metric 158.625,10.085 r180 top value=5.1kΩ
R8 "Comment" R_0603_1608Metric 163.725,10.085 r180 top value=5.1kΩ
R9 "Comment" R_0603_1608Metric 148.6,9.085 r0 top value=220Ω
R10 "Comment" R_0603_1608Metric 148.6,2.885 r0 top value=10kΩ
R11 "Comment" R_0603_1608Metric 154.5,8.21 r270 top value=220Ω
R12 "Comment" R_0603_1608Metric 167.5,8.21 r270 top value=220Ω
R13 "Comment" R_0603_1608Metric 142.5,8.21 r270 top value=220Ω
R14 "Comment" R_0603_1608Metric 129.5,8.21 r270 top value=220Ω
R15 "Comment" R_0603_1608Metric 148.5,18.485 r180 top value=10kΩ
R16 "Comment" R_0603_1608Metric 148.5,30.485 r180 top value=10kΩ
R17 "Comment" R_0603_1608Metric 148.5,26.485 r180 top value=10kΩ
R18 "Comment" R_0603_1608Metric 148.5,34.485 r180 top value=10kΩ
R19 "Comment" R_0603_1608Metric 148.5,22.485 r180 top value=10kΩ
R20 "Comment" R_0603_1608Metric 148.5,46.485 r180 top value=10kΩ
R21 "Comment" R_0603_1608Metric 148.5,38.485 r0 top value=10kΩ
R22 "Comment" R_0603_1608Metric 121.525,71.817 r270 top value=1kΩ
R23 "Comment" R_0603_1608Metric 116.3,70.985 r90 top value=10kΩ
R24 "Comment" R_0603_1608Metric 108.477,97.26 r0 top value=10kΩ
R25 "Comment" R_0603_1608Metric 103.7,69.56 r270 top value=1kΩ
R26 "Comment" R_0603_1608Metric 106.2,69.61 r270 top value=1kΩ
R27 "Comment" R_0603_1608Metric 102.2,69.485 r90 top value=5.6kΩ
SW1 "Comment" SW_Tactile_SPST_NO_Straight_CK_PTS636Sx25SMTRLFS 117.9,6.96 r90 top value=BOOT
SW2 "Comment" SW_Tactile_SPST_NO_Straight_CK_PTS636Sx25SMTRLFS 123.15,6.96 r90 top value=RST
SW3 "Comment" SW_Tactile_SPST_NO_Straight_CK_PTS636Sx25SMTRLFS 179,6.785 r270 top value=BOOT
SW4 "Comment" SW_Tactile_SPST_NO_Straight_CK_PTS636Sx25SMTRLFS 173.75,6.785 r270 top value=RST
U1 "Comment" QFN-68-1EP_8x8mm_P0.4mm_EP5.2x5.2mm 122.563,51.135 r0 top value=STM32H562RIVx
U2 "Comment" ESP32-S3-WROOM-1U 178.404,51.195 r0 top value=ESP32-S3-WROOM-1
U3 "Comment" SOT-23-5 121.426,20.836 r180 top value=AP2112K-3.3
U4 "Comment" LGA-14L_2P5X3X0P83_STM 176.3,28.885 r0 top value=LSM6DSO32
U5 "Comment" WIRELM-SMD_22P-L20.0-W14.0-P1.27-BR 148.5,76.485 r180 top value=E220-400M22S
U6 "Comment" LGA-8_3x5mm_P1.25mm 176.356,22.51 r180 top value=MS5611-01BA
U7 "Comment" XCVR_L86-M33 110,82.035 r90 top value=L86-M33
Y1 "Comment" Crystal_SMD_3225-4Pin_3.2x2.5mm 115.3,52.585 r90 top value=Crystal_GND24

## Footprints (in the part's own frame and the unit in brackets; to place one, negate y for a bottom-side part, rotate by r counter-clockwise, add the part's x,y. Pads: shape width x height; smd on the part's side, far side on the other; paste and mask are expansions set on the pad)
C_0603_1608Metric [mm]
  rrect25% 0.9x0.95 smd paste-0.95 mask-0.95: 1(-0.775,0) 2(0.775,0)
  F.SilkS lines w0.254: 0.141,0.51 -0.141,0.51 ; 0.141,-0.51 -0.141,-0.51
  F.CrtYd lines w0.254: 1.48,0.73 -1.48,0.73 -1.48,-0.73 1.48,-0.73 1.48,0.73
C_0805_2012Metric [mm]
  rrect25% 1x1.45 smd paste-1.45 mask-1.45: 1(-0.95,0) 2(0.95,0)
  F.SilkS lines w0.254: 0.261,-0.735 -0.261,-0.735 ; 0.261,0.735 -0.261,0.735
  F.CrtYd lines w0.254: 1.7,-0.98 1.7,0.98 -1.7,0.98 -1.7,-0.98 1.7,-0.98
Crystal_SMD_3225-4Pin_3.2x2.5mm [mm]
  rrect21% 1.4x1.2 smd paste-1.4 mask-1.4: 1(-1.1,-0.85) 2(1.1,-0.85) 3(1.1,0.85) 4(-1.1,0.85)
  F.SilkS lines w0.254: -2.06,1.71 -2.06,-1.71 2.06,-1.71
  F.CrtYd lines w0.254: -2.1,1.75 2.1,1.75 2.1,-1.75 -2.1,-1.75 -2.1,1.75
ESP32-S3-WROOM-1U [mm]
  rect 1.5x0.9 smd paste-1.5 mask-1.5: 1(-8.75,8.41) 2(-8.75,7.14) 3(-8.75,5.87) 4(-8.75,4.6) 5(-8.75,3.33) 6(-8.75,2.06) 7(-8.75,0.79) 8(-8.75,-0.48) 9(-8.75,-1.75) 10(-8.75,-3.02) 11(-8.75,-4.29) 12(-8.75,-5.56) 13(-8.75,-6.83) 14(-8.75,-8.1) 27(8.75,-8.1) 28(8.75,-6.83) 29(8.75,-5.56) 30(8.75,-4.29) 31(8.75,-3.02) 32(8.75,-1.75) 33(8.75,-0.48) 34(8.75,0.79) 35(8.75,2.06) 36(8.75,3.33) 37(8.75,4.6) 38(8.75,5.87) 39(8.75,7.14) 40(8.75,8.41)
  rect 0.9x1.5 smd paste-1.5 mask-1.5: 15(-6.985,-9.35) 16(-5.715,-9.35) 17(-4.445,-9.35) 18(-3.175,-9.35) 19(-1.905,-9.35) 20(-0.635,-9.35) 21(0.635,-9.35) 22(1.905,-9.35) 23(3.175,-9.35) 24(4.445,-9.35) 25(5.715,-9.35) 26(6.985,-9.35)
  round 0.6 hole 0.2 paste-2539.97 mask-0.6: 41(-2.9,-0.01) 41(-2.9,1.39) 41(-2.2,-0.71) 41(-2.2,0.69) 41(-2.2,2.09) 41(-1.5,-0.01) 41(-1.5,1.39) 41(-0.8,-0.71) 41(-0.8,0.69) 41(-0.8,2.09) 41(-0.1,-0.01) 41(-0.1,1.39)
  rect 3.9x3.9 smd paste-3.9 mask-3.9: 41(-1.5,0.69)
  rect 0.9x0.9 on Mid13 paste-0.9 mask-0.9: Un1(-2.904,-0.71) Un2(-2.9,2.09) Un3(-2.9,0.69) Un4(-1.504,-0.71) Un5(-1.5,2.09) Un6(-1.5,0.69) Un7(-0.104,-0.71) Un8(-0.1,2.09) Un9(-0.1,0.69)
  F.SilkS region: -9.2,9.05 -9.7,9.05 -9.2,9.55
  F.SilkS lines w0.254: -9.2,-8.8 -9.2,-9.8 -7.7,-9.8 ; -9.2,9.8 9.2,9.8 9.2,9.1 ; 7.7,-9.8 9.2,-9.8 9.2,-8.8
  F.CrtYd lines w0.254: -9.75,-10.3 -9.75,9.85 9.75,9.85 9.75,-10.3 -9.75,-10.3
L_0603_1608Metric [mm]
  rrect25% 0.875x0.95 smd paste-0.95 mask-0.95: 1(-0.787,0) 2(0.787,0)
  F.SilkS lines w0.254: -0.163,-0.51 0.163,-0.51 ; -0.163,0.51 0.163,0.51
  F.CrtYd lines w0.254: -1.48,-0.73 1.48,-0.73 1.48,0.73 -1.48,0.73 -1.48,-0.73
LED_0805_2012Metric [mm]
  rrect25% 0.975x1.4 smd paste-1.4 mask-1.4: 1(-0.937,0) 2(0.937,0)
  F.SilkS lines w0.254: 1,-0.96 -1.685,-0.96 -1.685,0.96 1,0.96
  F.CrtYd lines w0.254: -1.68,-0.95 1.68,-0.95 1.68,0.95 -1.68,0.95 -1.68,-0.95
LGA-8_3x5mm_P1.25mm [mm]
  rect 0.95x0.55 smd paste-0.95 mask-0.95: 1(-1.075,1.875) 2(-1.075,0.625) 3(-1.075,-0.625) 4(-1.075,-1.875) 5(1.075,-1.875) 6(1.075,-0.625) 7(1.075,0.625) 8(1.075,1.875)
  F.SilkS region: -1.55,2.6 -1.91,2.6 -1.55,2.96
  F.SilkS lines w0.254: 1.65,2.1 1.65,2.6 1.15,2.6 ; 1.65,-2.1 1.65,-2.6 1.15,-2.6 ; -0.6,2.6 -1.35,2.6 ; -1.15,-2.6 -1.65,-2.6 -1.65,-2.1
  F.CrtYd lines w0.254: 1.8,2.75 -1.8,2.75 -1.8,-2.75 1.8,-2.75 1.8,2.75
LGA-14L_2P5X3X0P83_STM [mil]
  rect 21x12 smd paste-21 mask-21: 1(-46.5,29.53) 2(-46.5,9.84) 3(-46.5,-9.84) 4(-46.5,-29.53) 8(46.5,-29.53) 9(46.5,-9.84) 10(46.5,9.84) 11(46.5,29.53)
  rect 12x21 smd paste-21 mask-21: 5(-19.69,-36.5) 6(0,-36.5) 7(19.68,-36.5) 12(19.68,36.5) 13(0,36.5) 14(-19.69,36.5)
  F.SilkS region: 77,2.34 67,2.34 67,17.34 77,17.34
  F.SilkS lines w10: -66,-45.05 -66,-56 -35.2,-56 ; -66,45.05 -66,56 -35.2,56 ; 35.2,-56 66,-56 66,-45.05 ; 35.2,56 66,56 66,45.05
  F.CrtYd lines w10: -71,-61 -71,-45.53 -71,45.53 -71,61 -35.69,61 35.68,61 71,61 71,45.53 71,-45.53 71,-61 35.68,-61 -35.69,-61 -71,-61
MountingHole_3mm_Pad_Via [mm]
  round 0.8 hole 0.5 paste-2539.97 mask-0.8: 1(-2.25,0) 1(-1.591,-1.591) 1(-1.591,1.591) 1(0,-2.25) 1(0,2.25) 1(1.591,-1.591) 1(1.591,1.591) 1(2.25,0)
  round 6 hole 3 paste-2539.97 mask-6: 1(0,0)
  Cmts.User circle w0.254: c0,0 r3
  F.CrtYd circle w0.254: c0,0 r3.25
PinHeader_1x11_P2.54mm_Vertical [mm]
  rect 1.7x1.7 hole 1 paste-2539.97 mask-1.7: 1(0,0)
  round 1.7 hole 1 paste-2539.97 mask-1.7: 2(0,-2.54) 3(0,-5.08) 4(0,-7.62) 5(0,-10.16) 6(0,-12.7) 7(0,-15.24) 8(0,-17.78) 9(0,-20.32) 10(0,-22.86) 11(0,-25.4)
  F.SilkS lines w0.254: -1.38,0 -1.38,1.38 0,1.38 ; -1.38,-26.78 1.38,-26.78 1.38,-1.27 -1.38,-1.27 -1.38,-26.78
  F.CrtYd lines w0.254: -1.77,-27.17 1.77,-27.17 1.77,1.77 -1.77,1.77 -1.77,-27.17
PinSocket_1x03_P2.54mm_Vertical [mm]
  rect 1.7x1.7 hole 1 paste-2539.97 mask-1.7: 1(0,0)
  round 1.7 hole 1 paste-2539.97 mask-1.7: 2(0,-2.54) 3(0,-5.08)
  F.SilkS lines w0.254: 1.33,0 1.33,1.33 0,1.33 ; 1.33,-1.27 1.33,-6.41 -1.33,-6.41 -1.33,-1.27 1.33,-1.27
  F.CrtYd lines w0.254: 1.75,1.8 -1.8,1.8 -1.8,-6.85 1.75,-6.85 1.75,1.8
PinSocket_1x09_P2.54mm_Vertical [mm]
  rect 1.7x1.7 hole 1 paste-2539.97 mask-1.7: 1(0,0)
  round 1.7 hole 1 paste-2539.97 mask-1.7: 2(0,-2.54) 3(0,-5.08) 4(0,-7.62) 5(0,-10.16) 6(0,-12.7) 7(0,-15.24) 8(0,-17.78) 9(0,-20.32)
  F.SilkS lines w0.254: 1.33,0 1.33,1.33 0,1.33 ; 1.33,-1.27 1.33,-21.65 -1.33,-21.65 -1.33,-1.27 1.33,-1.27
  F.CrtYd lines w0.254: 1.75,1.8 -1.8,1.8 -1.8,-22.1 1.75,-22.1 1.75,1.8
QFN-68-1EP_8x8mm_P0.4mm_EP5.2x5.2mm [mm]
  rrect25% 0.825x0.2 smd paste-0.825 mask-0.825: 1(-3.938,3.2) 2(-3.938,2.8) 3(-3.938,2.4) 4(-3.938,2) 5(-3.938,1.6) 6(-3.938,1.2) 7(-3.938,0.8) 8(-3.938,0.4) 9(-3.938,0) 10(-3.938,-0.4) 11(-3.938,-0.8) 12(-3.938,-1.2) 13(-3.938,-1.6) 14(-3.938,-2) 15(-3.938,-2.4) 16(-3.938,-2.8) 17(-3.938,-3.2) 35(3.938,-3.2) 36(3.938,-2.8) 37(3.938,-2.4) 38(3.938,-2) 39(3.938,-1.6) 40(3.938,-1.2) 41(3.938,-0.8) 42(3.938,-0.4) 43(3.938,0) 44(3.938,0.4) 45(3.938,0.8) 46(3.938,1.2) 47(3.938,1.6) 48(3.938,2) 49(3.938,2.4) 50(3.938,2.8) 51(3.938,3.2)
  rrect25% 0.2x0.825 smd paste-0.825 mask-0.825: 18(-3.2,-3.938) 19(-2.8,-3.938) 20(-2.4,-3.938) 21(-2,-3.938) 22(-1.6,-3.938) 23(-1.2,-3.938) 24(-0.8,-3.938) 25(-0.4,-3.938) 26(0,-3.938) 27(0.4,-3.938) 28(0.8,-3.938) 29(1.2,-3.938) 30(1.6,-3.938) 31(2,-3.938) 32(2.4,-3.938) 33(2.8,-3.938) 34(3.2,-3.938) 52(3.2,3.938) 53(2.8,3.938) 54(2.4,3.938) 55(2,3.938) 56(1.6,3.938) 57(1.2,3.938) 58(0.8,3.938) 59(0.4,3.938) 60(0,3.938) 61(-0.4,3.938) 62(-0.8,3.938) 63(-1.2,3.938) 64(-1.6,3.938) 65(-2,3.938) 66(-2.4,3.938) 67(-2.8,3.938) 68(-3.2,3.938)
  rect 5.2x5.2 smd paste-5.2 mask-5.2: 69(0,0)
  rrect24% 1.05x1.05 on Mid13 paste-1.05 mask-1.05: Un1(-1.95,1.95) Un2(-1.95,0.65) Un3(-1.95,-0.65) Un4(-1.95,-1.95) Un5(-0.65,1.95) Un6(-0.65,0.65) Un7(-0.65,-0.65) Un8(-0.65,-1.95) Un9(0.65,1.95) Un10(0.65,0.65) Un11(0.65,-0.65) Un12(0.65,-1.95) Un13(1.95,1.95) Un14(1.95,0.65) Un15(1.95,-0.65) Un16(1.95,-1.95)
  F.SilkS region: -4.61,3.2 -4.94,2.96 -4.94,3.44
  F.SilkS lines w0.254: -4.11,-3.56 -4.11,-4.11 -3.56,-4.11 ; -4.11,3.56 -4.11,4.11 -3.56,4.11 ; 3.56,-4.11 4.11,-4.11 4.11,-3.56 ; 3.56,4.11 4.11,4.11 4.11,3.56
  F.CrtYd lines w0.254: -4.6,-3.55 -4.6,3.55 -4.25,3.55 -4.25,4.25 -3.55,4.25 -3.55,4.6 3.55,4.6 3.55,4.25 4.25,4.25 4.25,3.55 4.6,3.55 4.6,-3.55 4.25,-3.55 4.25,-4.25 3.55,-4.25 3.55,-4.6 -3.55,-4.6 -3.55,-4.25 -4.25,-4.25 -4.25,-3.55 -4.6,-3.55
R_0603_1608Metric [mm]
  rrect25% 0.8x0.95 smd paste-0.95 mask-0.95: 1(-0.825,0) 2(0.825,0)
  F.SilkS lines w0.254: -0.237,-0.523 0.237,-0.523 ; -0.237,0.523 0.237,0.523
  F.CrtYd lines w0.254: -1.48,-0.73 1.48,-0.73 1.48,0.73 -1.48,0.73 -1.48,-0.73
SMA_Molex_73251-1153_EdgeMount_Horizontal [mm]
  rect 5.08x2.29 smd paste-5.08 mask-5.08: 1(-1.72,0)
  rect 5.08x2.42 smd paste-5.08 mask-5.08: 2(-1.72,4.38) 2(-1.72,-4.38)
  rect 5.08x2.42 on Mid2 paste-5.08 mask-5.08: 2(-1.72,4.38) 2(-1.72,-4.38)
  rect 0.95x0.46 smd paste-0.95 mask-0.95: 2(1.27,4.38) 2(1.27,-4.38)
  rect 0.95x0.46 on Mid2 paste-0.95 mask-0.95: 2(1.27,4.38) 2(1.27,-4.38)
  round 0.97 hole 0.46 paste-2539.97 mask-0.97: 2(1.72,4.38) 2(1.72,-4.38)
  F.SilkS lines w0.254: 2.5,-0.25 2.5,0.25 2,0 2.5,-0.25
  B.CrtYd lines w0.254: 2.71,-6.09 2.71,6.09 -14.29,6.09 -14.29,-6.09 2.71,-6.09
  F.CrtYd lines w0.254: 2.71,-6.09 2.71,6.09 -14.29,6.09 -14.29,-6.09 2.71,-6.09
SolderJumper-3_P1.3mm_Open_RoundedPad1.0x1.5mm_NumberLabels [mm]
  rect 1x0.5 smd paste-1 mask-1: 1(-1.3,0) 3(1.3,0)
  rect 1x1.5 smd paste-1.5 mask-1.5: 2(0,0)
  F.Cu circle w0: c1.3,0.25 r0.5
  F.Cu circle w0: c1.3,-0.25 r0.5
  F.Cu circle w0: c-1.3,0.25 r0.5
  F.Cu circle w0: c-1.3,-0.25 r0.5
  F.Cu region: 1.3,-0.75 0.75,-0.75 0.75,0.75 1.3,0.75
  F.Cu region: -0.75,-0.75 -1.3,-0.75 -1.3,0.75 -0.75,0.75
  F.Mask circle w0: c1.3,0.25 r0.5
  F.Mask circle w0: c1.3,-0.25 r0.5
  F.Mask circle w0: c-1.3,0.25 r0.5
  F.Mask circle w0: c-1.3,-0.25 r0.5
  F.Mask region: 1.3,-0.75 0.75,-0.75 0.75,0.75 1.3,0.75
  F.Mask region: -0.75,-0.75 -1.3,-0.75 -1.3,0.75 -0.75,0.75
  F.Mask lines w0.254: -0.75,-0.75 0.75,-0.75 0.75,0.75 -0.75,0.75 -0.75,-0.75
  F.SilkS lines w0.254: 1.35,-1 ccw(c1.35,-0.3) 2.05,-0.3 2.05,0.3 ccw(c1.35,0.3) 1.35,1 1.4,1 -1.4,1 -1.35,1 ccw(c-1.35,0.3) -2.05,0.3 -2.05,-0.3 ccw(c-1.35,-0.3) -1.35,-1 -1.4,-1 1.4,-1
  F.CrtYd lines w0.254: -2.3,-1.25 2.3,-1.25 2.3,1.25 -2.3,1.25 -2.3,-1.25
SOT-23-5 [mm]
  rrect25% 1.325x0.6 smd paste-1.325 mask-1.325: 1(-1.138,0.95) 2(-1.138,0) 3(-1.138,-0.95) 4(1.138,-0.95) 5(1.138,0.95)
  F.SilkS region: -1.45,1.51 -1.69,1.84 -1.21,1.84
  F.SilkS lines w0.254: 0.91,1.51 0.91,1.56 -0.91,1.51 -0.91,1.56 ; 0.91,0.39 0.91,-0.39 ; 0.91,-1.51 0.91,-1.56 -0.91,-1.56 -0.91,-1.51
  F.CrtYd lines w0.254: 2.05,1.5 2.05,0.39 1.05,0.39 1.05,-0.39 2.05,-0.39 2.05,-1.5 1.05,-1.5 1.05,-1.7 -1.05,-1.7 -1.05,-1.5 -2.05,-1.5 -2.05,1.5 -1.05,1.5 -1.05,1.7 1.05,1.7 1.05,1.5 2.05,1.5
SW_Tactile_SPST_NO_Straight_CK_PTS636Sx25SMTRLFS [mm]
  rect 1.25x1 smd paste-1.25 mask-1.25: 1(-3.875,0) 2(3.875,0)
  F.SilkS lines w0.254: -3.2,0.8 -3.2,2 3.2,2 3.2,0.8 ; -3.2,-0.8 -3.2,-2 3.2,-2 3.2,-0.8
  Dwgs.User lines w0.254: -1.35,0.65 1.35,0.65 1.35,-0.65 -1.35,-0.65 -1.35,0.65
  F.CrtYd lines w0.254: -3.3,2.1 3.3,2.1 3.3,0.75 4.75,0.75 4.75,-0.75 3.3,-0.75 3.3,-2.1 -3.3,-2.1 -3.3,-0.75 -4.75,-0.75 -4.75,0.75 -3.3,0.75 -3.3,2.1
TRANS_SS8050-G [mm]
  rect 0.8x0.6 smd paste-0.8 mask-0.8: 1(-1.01,0.95) 2(-1.01,-0.95) 3(1.01,0)
  F.SilkS circle w0.254: c-1.01,2.25 r0.1
  F.SilkS lines w0.254: -0.29,-1.45 0.65,-1.45 0.65,-0.62 ; -0.29,1.45 0.65,1.45 0.65,0.62
  F.CrtYd lines w0.254: -1.66,-1.7 1.66,-1.7 1.66,1.7 -1.66,1.7 -1.66,-1.7
USB_C_Receptacle_GCT_USB4105-xx-A_16P_TopMnt_Horizontal [mm]
  rrect25% 0.6x1.15 smd paste-1.15 mask-1.15: A1(-3.2,3.68) A4(-2.4,3.68) A9(2.4,3.68) A12(3.2,3.68) B1(3.2,3.68) B4(2.4,3.68) B9(-2.4,3.68) B12(-3.2,3.68)
  rrect25% 0.3x1.15 smd paste-1.15 mask-1.15: A5(-1.25,3.68) A6(-0.25,3.68) A7(0.25,3.68) A8(1.25,3.68) B5(1.75,3.68) B6(0.75,3.68) B7(-0.75,3.68) B8(-1.75,3.68)
  rrect100% 1x1.8 hole 1.4 slot 0.6 at 0 deg paste-2539.97 mask-1.8: S1(-4.32,-1.075) S1(4.32,-1.075)
  rrect100% 1x2.1 hole 1.7 slot 0.6 at 0 deg paste-2539.97 mask-2.1: S1(-4.32,3.105) S1(4.32,3.105)
  round 0.65 hole 0.65 paste-2539.97 mask-0.65: Un1(-2.89,2.605) Un2(2.89,2.605)
  F.SilkS lines w0.254: -4.67,0.1 -4.67,1.8 ; 4.67,0.1 4.67,1.8
  Dwgs.User lines w0.254: -5,-3.675 5,-3.675
  F.CrtYd lines w0.254: -5.32,-4.18 5.32,-4.18 5.32,4.76 -5.32,4.76 -5.32,-4.18
WIRELM-SMD_22P-L20.0-W14.0-P1.27-BR [mm]
  rect 1.7x1 smd paste-1.7 mask-1.7: 1(6.85,-8.5) 2(6.85,-7.23) 3(6.85,-5.96) 4(6.85,-0.39) 5(6.85,0.88) 6(6.85,2.15) 7(6.85,3.42) 8(6.85,4.69) 9(6.85,5.96) 10(6.85,7.23) 11(6.85,8.5) 12(-6.85,8.5) 13(-6.85,7.23) 14(-6.85,5.96) 15(-6.85,4.69) 16(-6.85,3.42) 17(-6.85,2.15) 18(-6.85,0.88) 19(-6.85,-0.39) 20(-6.85,-5.96) 21(-6.85,-7.23) 22(-6.85,-8.5)
  F.SilkS circle w0.254: c7,-9.5 r0.03
  F.SilkS circle w0.254: c7.5,-9.42 r0.17
  F.SilkS lines w0.254: 7,9.28 7,10.58 -7,10.58 -7,9.28 ; 7,-1.42 7,-4.92 ; 7,-9.27 7,-9.42 -7,-9.42 -6.99,-9.27 ; -7,-1.42 -7,-4.92
  Cmts.User circle w0.254: c7.77,-8.54 r0.2
XCVR_L86-M33 [mm]
  rrect100% 2.5x1 smd paste-2.5 mask-2.5: 1(-7.75,6.35) 2(-7.75,3.81) 3(-7.75,1.27) 4(-7.75,-1.27) 5(-7.75,-3.81) 6(-7.75,-6.35) 7(7.75,-6.35) 8(7.75,-3.81) 9(7.75,-1.27) 10(7.75,1.27) 11(7.75,3.81) 12(7.75,6.35)
  F.SilkS circle w0.254: c-8.75,7.5 r0.1
  F.SilkS lines w0.254: -8,7.4 -8,8.5 8,8.5 8,7.4 ; -8,-7.3 -8,-7.5 8,-7.5 8,-7.3
  F.Paste region: -7.048,-5.853 -6.996,-5.861 -6.945,-5.874 -6.897,-5.893 -6.85,-5.917 -6.806,-5.945 -6.765,-5.978 -6.728,-6.015 -6.695,-6.056 -6.667,-6.1 -6.643,-6.147 -6.624,-6.195 -6.611,-6.246 -6.603,-6.298 -6.6,-6.35 -6.603,-6.402 -6.611,-6.454 -6.624,-6.505 -6.643,-6.553 -6.667,-6.6 -6.695,-6.644 -6.728,-6.685 -6.765,-6.722 -6.806,-6.755 -6.85,-6.783 -6.897,-6.807 -6.945,-6.826 -6.996,-6.839 -7.048,-6.847 -7.1,-6.85 -8.9,-6.85 -8.952,-6.847 -9.004,-6.839 -9.055,-6.826 -9.103,-6.807 -9.15,-6.783 -9.194,-6.755 -9.235,-6.722 -9.272,-6.685 -9.305,-6.644 -9.333,-6.6 -9.357,-6.553 -9.376,-6.505 -9.389,-6.454 -9.397,-6.402 -9.4,-6.35 -9.397,-6.298 -9.389,-6.246 -9.376,-6.195 -9.357,-6.147 -9.333,-6.1 -9.305,-6.056 -9.272,-6.015 -9.235,-5.978 -9.194,-5.945 -9.15,-5.917 -9.103,-5.893 -9.055,-5.874 -9.004,-5.861 -8.952,-5.853 -8.9,-5.85 -7.1,-5.85
  F.Paste region: -7.048,-3.313 -6.996,-3.321 -6.945,-3.334 -6.897,-3.353 -6.85,-3.377 -6.806,-3.405 -6.765,-3.438 -6.728,-3.475 -6.695,-3.516 -6.667,-3.56 -6.643,-3.607 -6.624,-3.655 -6.611,-3.706 -6.603,-3.758 -6.6,-3.81 -6.603,-3.862 -6.611,-3.914 -6.624,-3.965 -6.643,-4.013 -6.667,-4.06 -6.695,-4.104 -6.728,-4.145 -6.765,-4.182 -6.806,-4.215 -6.85,-4.243 -6.897,-4.267 -6.945,-4.286 -6.996,-4.299 -7.048,-4.307 -7.1,-4.31 -8.9,-4.31 -8.952,-4.307 -9.004,-4.299 -9.055,-4.286 -9.103,-4.267 -9.15,-4.243 -9.194,-4.215 -9.235,-4.182 -9.272,-4.145 -9.305,-4.104 -9.333,-4.06 -9.357,-4.013 -9.376,-3.965 -9.389,-3.914 -9.397,-3.862 -9.4,-3.81 -9.397,-3.758 -9.389,-3.706 -9.376,-3.655 -9.357,-3.607 -9.333,-3.56 -9.305,-3.516 -9.272,-3.475 -9.235,-3.438 -9.194,-3.405 -9.15,-3.377 -9.103,-3.353 -9.055,-3.334 -9.004,-3.321 -8.952,-3.313 -8.9,-3.31 -7.1,-3.31
  F.Paste region: -7.048,-0.773 -6.996,-0.781 -6.945,-0.794 -6.897,-0.813 -6.85,-0.837 -6.806,-0.865 -6.765,-0.898 -6.728,-0.935 -6.695,-0.976 -6.667,-1.02 -6.643,-1.067 -6.624,-1.115 -6.611,-1.166 -6.603,-1.218 -6.6,-1.27 -6.603,-1.322 -6.611,-1.374 -6.624,-1.425 -6.643,-1.473 -6.667,-1.52 -6.695,-1.564 -6.728,-1.605 -6.765,-1.642 -6.806,-1.675 -6.85,-1.703 -6.897,-1.727 -6.945,-1.746 -6.996,-1.759 -7.048,-1.767 -7.1,-1.77 -8.9,-1.77 -8.952,-1.767 -9.004,-1.759 -9.055,-1.746 -9.103,-1.727 -9.15,-1.703 -9.194,-1.675 -9.235,-1.642 -9.272,-1.605 -9.305,-1.564 -9.333,-1.52 -9.357,-1.473 -9.376,-1.425 -9.389,-1.374 -9.397,-1.322 -9.4,-1.27 -9.397,-1.218 -9.389,-1.166 -9.376,-1.115 -9.357,-1.067 -9.333,-1.02 -9.305,-0.976 -9.272,-0.935 -9.235,-0.898 -9.194,-0.865 -9.15,-0.837 -9.103,-0.813 -9.055,-0.794 -9.004,-0.781 -8.952,-0.773 -8.9,-0.77 -7.1,-0.77
  F.Paste region: -7.048,1.767 -6.996,1.759 -6.945,1.746 -6.897,1.727 -6.85,1.703 -6.806,1.675 -6.765,1.642 -6.728,1.605 -6.695,1.564 -6.667,1.52 -6.643,1.473 -6.624,1.425 -6.611,1.374 -6.603,1.322 -6.6,1.27 -6.603,1.218 -6.611,1.166 -6.624,1.115 -6.643,1.067 -6.667,1.02 -6.695,0.976 -6.728,0.935 -6.765,0.898 -6.806,0.865 -6.85,0.837 -6.897,0.813 -6.945,0.794 -6.996,0.781 -7.048,0.773 -7.1,0.77 -8.9,0.77 -8.952,0.773 -9.004,0.781 -9.055,0.794 -9.103,0.813 -9.15,0.837 -9.194,0.865 -9.235,0.898 -9.272,0.935 -9.305,0.976 -9.333,1.02 -9.357,1.067 -9.376,1.115 -9.389,1.166 -9.397,1.218 -9.4,1.27 -9.397,1.322 -9.389,1.374 -9.376,1.425 -9.357,1.473 -9.333,1.52 -9.305,1.564 -9.272,1.605 -9.235,1.642 -9.194,1.675 -9.15,1.703 -9.103,1.727 -9.055,1.746 -9.004,1.759 -8.952,1.767 -8.9,1.77 -7.1,1.77
  F.Paste region: -7.048,4.307 -6.996,4.299 -6.945,4.286 -6.897,4.267 -6.85,4.243 -6.806,4.215 -6.765,4.182 -6.728,4.145 -6.695,4.104 -6.667,4.06 -6.643,4.013 -6.624,3.965 -6.611,3.914 -6.603,3.862 -6.6,3.81 -6.603,3.758 -6.611,3.706 -6.624,3.655 -6.643,3.607 -6.667,3.56 -6.695,3.516 -6.728,3.475 -6.765,3.438 -6.806,3.405 -6.85,3.377 -6.897,3.353 -6.945,3.334 -6.996,3.321 -7.048,3.313 -7.1,3.31 -8.9,3.31 -8.952,3.313 -9.004,3.321 -9.055,3.334 -9.103,3.353 -9.15,3.377 -9.194,3.405 -9.235,3.438 -9.272,3.475 -9.305,3.516 -9.333,3.56 -9.357,3.607 -9.376,3.655 -9.389,3.706 -9.397,3.758 -9.4,3.81 -9.397,3.862 -9.389,3.914 -9.376,3.965 -9.357,4.013 -9.333,4.06 -9.305,4.104 -9.272,4.145 -9.235,4.182 -9.194,4.215 -9.15,4.243 -9.103,4.267 -9.055,4.286 -9.004,4.299 -8.952,4.307 -8.9,4.31 -7.1,4.31
  F.Paste region: -7.048,6.847 -6.996,6.839 -6.945,6.826 -6.897,6.807 -6.85,6.783 -6.806,6.755 -6.765,6.722 -6.728,6.685 -6.695,6.644 -6.667,6.6 -6.643,6.553 -6.624,6.505 -6.611,6.454 -6.603,6.402 -6.6,6.35 -6.603,6.298 -6.611,6.246 -6.624,6.195 -6.643,6.147 -6.667,6.1 -6.695,6.056 -6.728,6.015 -6.765,5.978 -6.806,5.945 -6.85,5.917 -6.897,5.893 -6.945,5.874 -6.996,5.861 -7.048,5.853 -7.1,5.85 -8.9,5.85 -8.952,5.853 -9.004,5.861 -9.055,5.874 -9.103,5.893 -9.15,5.917 -9.194,5.945 -9.235,5.978 -9.272,6.015 -9.305,6.056 -9.333,6.1 -9.357,6.147 -9.376,6.195 -9.389,6.246 -9.397,6.298 -9.4,6.35 -9.397,6.402 -9.389,6.454 -9.376,6.505 -9.357,6.553 -9.333,6.6 -9.305,6.644 -9.272,6.685 -9.235,6.722 -9.194,6.755 -9.15,6.783 -9.103,6.807 -9.055,6.826 -9.004,6.839 -8.952,6.847 -8.9,6.85 -7.1,6.85
  F.Paste region: 8.952,-5.853 9.004,-5.861 9.055,-5.874 9.103,-5.893 9.15,-5.917 9.194,-5.945 9.235,-5.978 9.272,-6.015 9.305,-6.056 9.333,-6.1 9.357,-6.147 9.376,-6.195 9.389,-6.246 9.397,-6.298 9.4,-6.35 9.397,-6.402 9.389,-6.454 9.376,-6.505 9.357,-6.553 9.333,-6.6 9.305,-6.644 9.272,-6.685 9.235,-6.722 9.194,-6.755 9.15,-6.783 9.103,-6.807 9.055,-6.826 9.004,-6.839 8.952,-6.847 8.9,-6.85 7.1,-6.85 7.048,-6.847 6.996,-6.839 6.945,-6.826 6.897,-6.807 6.85,-6.783 6.806,-6.755 6.765,-6.722 6.728,-6.685 6.695,-6.644 6.667,-6.6 6.643,-6.553 6.624,-6.505 6.611,-6.454 6.603,-6.402 6.6,-6.35 6.603,-6.298 6.611,-6.246 6.624,-6.195 6.643,-6.147 6.667,-6.1 6.695,-6.056 6.728,-6.015 6.765,-5.978 6.806,-5.945 6.85,-5.917 6.897,-5.893 6.945,-5.874 6.996,-5.861 7.048,-5.853 7.1,-5.85 8.9,-5.85
  F.Paste region: 8.952,-3.313 9.004,-3.321 9.055,-3.334 9.103,-3.353 9.15,-3.377 9.194,-3.405 9.235,-3.438 9.272,-3.475 9.305,-3.516 9.333,-3.56 9.357,-3.607 9.376,-3.655 9.389,-3.706 9.397,-3.758 9.4,-3.81 9.397,-3.862 9.389,-3.914 9.376,-3.965 9.357,-4.013 9.333,-4.06 9.305,-4.104 9.272,-4.145 9.235,-4.182 9.194,-4.215 9.15,-4.243 9.103,-4.267 9.055,-4.286 9.004,-4.299 8.952,-4.307 8.9,-4.31 7.1,-4.31 7.048,-4.307 6.996,-4.299 6.945,-4.286 6.897,-4.267 6.85,-4.243 6.806,-4.215 6.765,-4.182 6.728,-4.145 6.695,-4.104 6.667,-4.06 6.643,-4.013 6.624,-3.965 6.611,-3.914 6.603,-3.862 6.6,-3.81 6.603,-3.758 6.611,-3.706 6.624,-3.655 6.643,-3.607 6.667,-3.56 6.695,-3.516 6.728,-3.475 6.765,-3.438 6.806,-3.405 6.85,-3.377 6.897,-3.353 6.945,-3.334 6.996,-3.321 7.048,-3.313 7.1,-3.31 8.9,-3.31
  F.Paste region: 8.952,-0.773 9.004,-0.781 9.055,-0.794 9.103,-0.813 9.15,-0.837 9.194,-0.865 9.235,-0.898 9.272,-0.935 9.305,-0.976 9.333,-1.02 9.357,-1.067 9.376,-1.115 9.389,-1.166 9.397,-1.218 9.4,-1.27 9.397,-1.322 9.389,-1.374 9.376,-1.425 9.357,-1.473 9.333,-1.52 9.305,-1.564 9.272,-1.605 9.235,-1.642 9.194,-1.675 9.15,-1.703 9.103,-1.727 9.055,-1.746 9.004,-1.759 8.952,-1.767 8.9,-1.77 7.1,-1.77 7.048,-1.767 6.996,-1.759 6.945,-1.746 6.897,-1.727 6.85,-1.703 6.806,-1.675 6.765,-1.642 6.728,-1.605 6.695,-1.564 6.667,-1.52 6.643,-1.473 6.624,-1.425 6.611,-1.374 6.603,-1.322 6.6,-1.27 6.603,-1.218 6.611,-1.166 6.624,-1.115 6.643,-1.067 6.667,-1.02 6.695,-0.976 6.728,-0.935 6.765,-0.898 6.806,-0.865 6.85,-0.837 6.897,-0.813 6.945,-0.794 6.996,-0.781 7.048,-0.773 7.1,-0.77 8.9,-0.77
  F.Paste region: 8.952,1.767 9.004,1.759 9.055,1.746 9.103,1.727 9.15,1.703 9.194,1.675 9.235,1.642 9.272,1.605 9.305,1.564 9.333,1.52 9.357,1.473 9.376,1.425 9.389,1.374 9.397,1.322 9.4,1.27 9.397,1.218 9.389,1.166 9.376,1.115 9.357,1.067 9.333,1.02 9.305,0.976 9.272,0.935 9.235,0.898 9.194,0.865 9.15,0.837 9.103,0.813 9.055,0.794 9.004,0.781 8.952,0.773 8.9,0.77 7.1,0.77 7.048,0.773 6.996,0.781 6.945,0.794 6.897,0.813 6.85,0.837 6.806,0.865 6.765,0.898 6.728,0.935 6.695,0.976 6.667,1.02 6.643,1.067 6.624,1.115 6.611,1.166 6.603,1.218 6.6,1.27 6.603,1.322 6.611,1.374 6.624,1.425 6.643,1.473 6.667,1.52 6.695,1.564 6.728,1.605 6.765,1.642 6.806,1.675 6.85,1.703 6.897,1.727 6.945,1.746 6.996,1.759 7.048,1.767 7.1,1.77 8.9,1.77
  F.Paste region: 8.952,4.307 9.004,4.299 9.055,4.286 9.103,4.267 9.15,4.243 9.194,4.215 9.235,4.182 9.272,4.145 9.305,4.104 9.333,4.06 9.357,4.013 9.376,3.965 9.389,3.914 9.397,3.862 9.4,3.81 9.397,3.758 9.389,3.706 9.376,3.655 9.357,3.607 9.333,3.56 9.305,3.516 9.272,3.475 9.235,3.438 9.194,3.405 9.15,3.377 9.103,3.353 9.055,3.334 9.004,3.321 8.952,3.313 8.9,3.31 7.1,3.31 7.048,3.313 6.996,3.321 6.945,3.334 6.897,3.353 6.85,3.377 6.806,3.405 6.765,3.438 6.728,3.475 6.695,3.516 6.667,3.56 6.643,3.607 6.624,3.655 6.611,3.706 6.603,3.758 6.6,3.81 6.603,3.862 6.611,3.914 6.624,3.965 6.643,4.013 6.667,4.06 6.695,4.104 6.728,4.145 6.765,4.182 6.806,4.215 6.85,4.243 6.897,4.267 6.945,4.286 6.996,4.299 7.048,4.307 7.1,4.31 8.9,4.31
  F.Paste region: 8.952,6.847 9.004,6.839 9.055,6.826 9.103,6.807 9.15,6.783 9.194,6.755 9.235,6.722 9.272,6.685 9.305,6.644 9.333,6.6 9.357,6.553 9.376,6.505 9.389,6.454 9.397,6.402 9.4,6.35 9.397,6.298 9.389,6.246 9.376,6.195 9.357,6.147 9.333,6.1 9.305,6.056 9.272,6.015 9.235,5.978 9.194,5.945 9.15,5.917 9.103,5.893 9.055,5.874 9.004,5.861 8.952,5.853 8.9,5.85 7.1,5.85 7.048,5.853 6.996,5.861 6.945,5.874 6.897,5.893 6.85,5.917 6.806,5.945 6.765,5.978 6.728,6.015 6.695,6.056 6.667,6.1 6.643,6.147 6.624,6.195 6.611,6.246 6.603,6.298 6.6,6.35 6.603,6.402 6.611,6.454 6.624,6.505 6.643,6.553 6.667,6.6 6.695,6.644 6.728,6.685 6.765,6.722 6.806,6.755 6.85,6.783 6.897,6.807 6.945,6.826 6.996,6.839 7.048,6.847 7.1,6.85 8.9,6.85
  F.CrtYd lines w0.254: -11,11.5 -11,-10.5 11,-10.5 11,11.5 -11,11.5